# EAGLE board SparkFun_Simultaneous_RFID_Reader_M7E-Panel (EAGLE 9.6.2), part 1 of 3
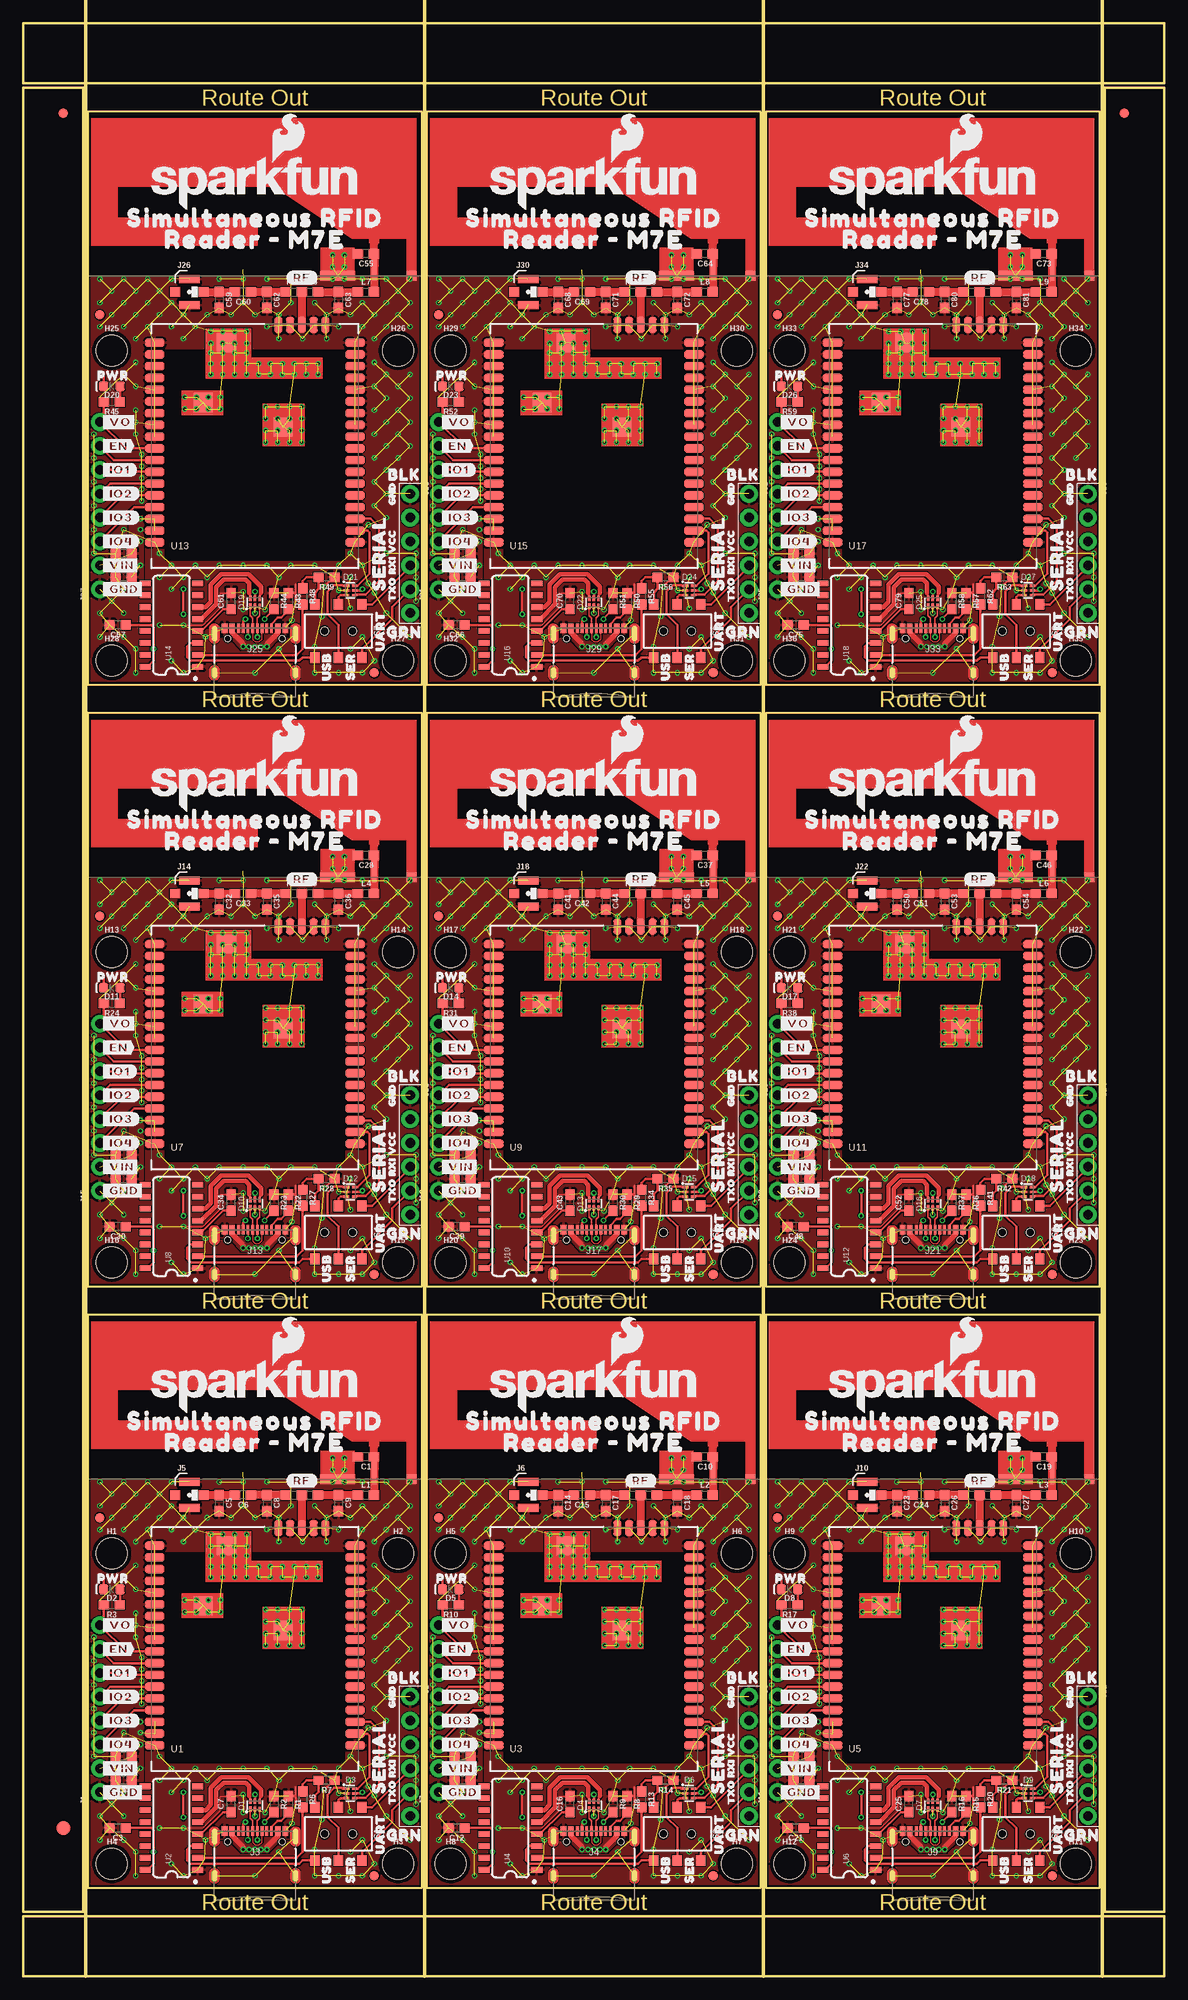
[diagram p0: board, top side]
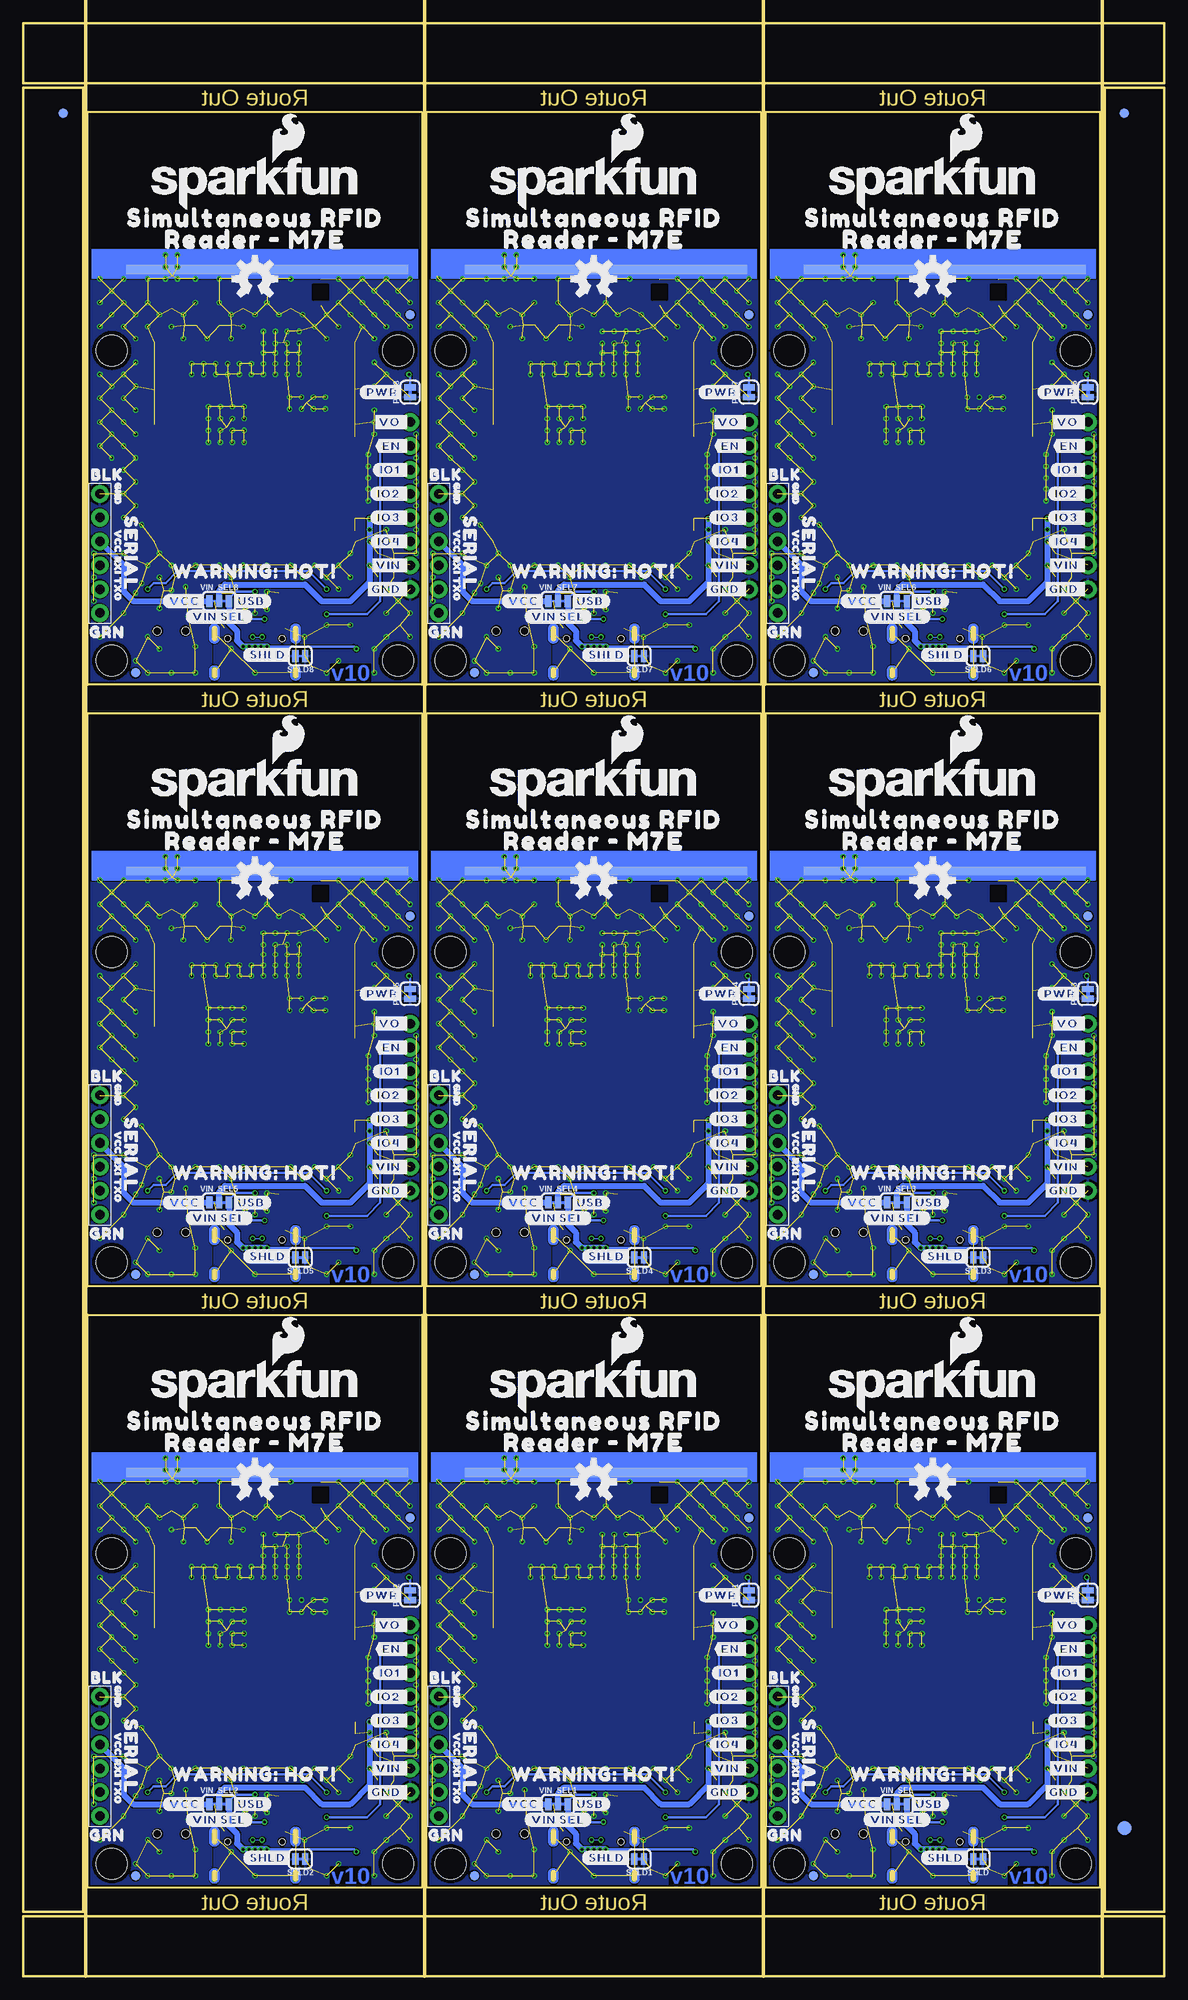
[diagram p1: board, bottom side, seen from below]

Size 121.41 x 207.77 mm. Coordinates in mm from the lower left corner, seen from the top.
Outline: 6.86,9.4 42.42,9.4 42.42,70.36 6.86,70.36 6.86,9.4
Outline: 42.93,9.4 78.49,9.4 78.49,70.36 42.93,70.36 42.93,9.4
Outline: 78.99,9.4 114.55,9.4 114.55,70.36 78.99,70.36 78.99,9.4
Outline: 6.86,73.41 42.42,73.41 42.42,134.37 6.86,134.37 6.86,73.41
Outline: 42.93,73.41 78.49,73.41 78.49,134.37 42.93,134.37 42.93,73.41
Outline: 78.99,73.41 114.55,73.41 114.55,134.37 78.99,134.37 78.99,73.41
Outline: 6.86,137.41 42.42,137.41 42.42,198.37 6.86,198.37 6.86,137.41
Outline: 42.93,137.41 78.49,137.41 78.49,198.37 42.93,198.37 42.93,137.41
Outline: 78.99,137.41 114.55,137.41 114.55,198.37 78.99,198.37 78.99,137.41
Outline: 0,6.35 121.41,6.35 121.41,0 0,0 0,6.35
Outline: 115.06,200.91 121.41,200.91 121.41,6.86 115.06,6.86 115.06,200.91
Outline: 0,207.77 121.41,207.77 121.41,201.42 0,201.42 0,207.77
Outline: 0,200.91 6.35,200.91 6.35,6.86 0,6.86 0,200.91
Copper layers (1*16): Top 0.035mm / dielectric 1.5mm / Bottom 0.035mm
Design rules "SparkFun_Simultaneous_RFID_Reader_M7E": minimum track width 5mil, minimum drill 0.3mm, track to track 5mil, track to pad 5mil, pad to pad 5mil, via to via 5mil, smd to smd 5mil, copper to edge 7mil, drill to drill 7mil, minimum pad ring 5mil, minimum via ring 5mil, stop-mask expansion 2.5mil, vias tented up to drill 25mil, thermal gap 10mil
Net classes: 1 USB: width 0.185 mm, clearance 0.127 mm
tRestrict: area 23.1,50.7 to 23.6,51.7; area 28.6,50.7 to 29.1,51.7; area 30.2,50.7 to 30.7,51.7; area 36.2,50.7 to 36.7,51.7; area 59.2,50.7 to 59.7,51.7; area 64.6,50.7 to 65.2,51.7; area 66.3,50.7 to 66.8,51.7; area 72.3,50.7 to 72.8,51.7; area 95.2,50.7 to 95.8,51.7; area 100.7,50.7 to 101.2,51.7; area 102.4,50.7 to 102.9,51.7; area 108.3,50.7 to 108.8,51.7; area 23.1,114.7 to 23.6,115.7; area 28.6,114.7 to 29.1,115.7; area 30.2,114.7 to 30.7,115.7; area 36.2,114.7 to 36.7,115.7; area 59.2,114.7 to 59.7,115.7; area 64.6,114.7 to 65.2,115.7; area 66.3,114.7 to 66.8,115.7; area 72.3,114.7 to 72.8,115.7; area 95.2,114.7 to 95.8,115.7; area 100.7,114.7 to 101.2,115.7; area 102.4,114.7 to 102.9,115.7; area 108.3,114.7 to 108.8,115.7; area 23.1,178.7 to 23.6,179.7; area 28.6,178.7 to 29.1,179.7; area 30.2,178.7 to 30.7,179.7; area 36.2,178.7 to 36.7,179.7; area 59.2,178.7 to 59.7,179.7; area 64.6,178.7 to 65.2,179.7; area 66.3,178.7 to 66.8,179.7; area 72.3,178.7 to 72.8,179.7; area 95.2,178.7 to 95.8,179.7; area 100.7,178.7 to 101.2,179.7; area 102.4,178.7 to 102.9,179.7; area 108.3,178.7 to 108.8,179.7
Milling: 4 lines

## Footprints (pad centres in the part's own frame; a part is rotated, then mirrored left to right if it is on the bottom)
0603 = smd 1.1 x 1: 1 -0.85,0; 2 0.85,0
SOT886 = smd 0.61 x 0.25: 1 -0.405,0.5 | smd 0.56 x 0.25: 2 -0.43,0; 3 -0.43,-0.5; 4 0.43,-0.5; 5 0.43,0; 6 0.43,0.5
LED-0603 = smd 1 x 1: A -0.877,0; C 0.877,0
TRACE_ANTENNA_915MHZ_THINGMAGIC = smd 0.44 x 3: ANT -0.006,-1.315 | smd 1.02 x 1: GND@1 -3.966,-0.315 | smd 3.677 x 1: GND@2 3.909,-0.315 | smd 30 x 1 bottom: GND@3 14,-1
FIDUCIAL-1X2 = smd 1 x 1: 1 0,0
FIDUCIAL-1.5X3 = smd 1.5 x 1.5: 1 0,0
STAND-OFF = hole 3.302: 0,0
1X08_NO_SILK = drill 1.016 pad 1.88: 1 0,0; 2 2.54,0; 3 5.08,0; 4 7.62,0; 5 10.16,0; 6 12.7,0; 7 15.24,0; 8 17.78,0
1X06_NO_SILK = drill 1.016 pad 1.88: 1 0,0; 2 2.54,0; 3 5.08,0; 4 7.62,0; 5 10.16,0; 6 12.7,0
USB-C-16P-2LAYER-PADS = smd 0.3 x 1: A5 -1.25,-0.34; A6 -0.25,-0.34; A7 0.25,-0.34; A8 1.25,-0.34; B5 1.75,-0.34; B6 0.75,-0.34; B7 -0.75,-0.34; B8 -1.75,-0.34 | smd 0.6 x 1: GND -3.225,-0.34; GND2 3.225,-0.34; VBUS1 -2.45,-0.34; VBUS2 2.45,-0.34 | drill 0.4 pad 0.6 long: SHLD1 -4.318,-0.915; SHLD2 4.318,-0.915; SHLD3 -4.318,-5.095; SHLD4 4.318,-5.095 | hole 0.65: -2.89,-1.445; 2.89,-1.445
U.FL = smd 2.2 x 0.85: 1 0,1.375; 2 0,-1.375 | smd 1.05 x 1: FEED 1.525,0; NC -1.525,0
SMT-JUMPER_2_NC_TRACE_SILK = smd 0.66 x 1.27: 1 -0.521,0; 2 0.521,0
SWITCH_DPDT_SMD_AYZ0202 = smd 1 x 1.15: 1 -2.5,2.825; 2 0,2.825; 3 2.5,2.825; 4 -2.5,-2.825; 5 0,-2.825; 6 2.5,-2.825 | hole 0.85: 1.5,0; -1.5,0
M7E_HECTO_MODULE = smd 2.075 x 0.85: 1 -10.662,11; 2 -10.662,9.75; 3 -10.662,8.5; 4 -10.662,7.25; 5 -10.662,6; 6 -10.662,4.75; 7 -10.662,3.5; 8 -10.662,2.25; 9 -10.662,1; 10 -10.662,-0.25; 11 -10.662,-1.5; 12 -10.662,-2.75; 13 -10.662,-4; 14 -10.662,-5.25; 15 -10.662,-6.5; 16 -10.662,-7.75; 17 -10.662,-9; 18 -10.662,-10.25; 19 10.662,-10.25; 20 10.662,-9; 21 10.662,-7.75; 22 10.662,-6.5; 23 10.662,-5.25; 24 10.662,-4; 25 10.662,-2.75; 26 10.662,-1.5; 27 10.662,-0.25; 28 10.662,1; 29 10.662,2.25; 30 10.662,3.5; 31 10.662,4.75; 32 10.662,6; 33 10.662,7.25; 34 10.662,8.5; 35 10.662,9.75; 36 10.662,11 | smd 0.85 x 1.665: 37 7.5,12.867; 38 6.25,12.867; 39 5,12.867; 40 3.75,12.867; 41 2.5,12.867 | smd 2 x 2: GND_PAD1 3,2; GND_PAD2 -3,11; GND_PAD3 -5.5,4.625
SO016 = smd 0.6 x 1.2: 1 -4.445,-2.8; 2 -3.175,-2.8; 3 -1.905,-2.8; 4 -0.635,-2.8; 5 0.635,-2.8; 6 1.905,-2.8; 7 3.175,-2.8; 8 4.445,-2.8; 9 4.445,2.8; 10 3.175,2.8; 11 1.905,2.8; 12 0.635,2.8; 13 -0.635,2.8; 14 -1.905,2.8; 15 -3.175,2.8; 16 -4.445,2.8
SMT-JUMPER_3_2-NC_TRACE_SILK = smd 0.66 x 1.27: 1 -1.041,0; 2 0,0; 3 1.041,0

## Placement (x,y rotation side)
C1  DNP  [0603]  36.45,55.25 180 top
C2  10nF  [0603]  10.67,23.37 180 top
C3  0.1uF  [0603]  10.03,15.75 180 top
C4  0.1uF  [0603]  10.67,20.83 180 top
C5  DNP  [0603]  20.83,50.33 270 top
C6  1nF  [0603]  23.37,51.18 180 top
C7  10nF  [0603]  22.1,18.29 90 top
C8  DNP  [0603]  25.91,50.33 270 top
C9  DNP  [0603]  33.53,50.33 270 top
C10  DNP  [0603]  72.52,55.25 180 top
C11  10nF  [0603]  46.74,23.37 180 top
C12  0.1uF  [0603]  46.1,15.75 180 top
C13  0.1uF  [0603]  46.74,20.83 180 top
C14  DNP  [0603]  56.9,50.33 270 top
C15  1nF  [0603]  59.44,51.18 180 top
C16  10nF  [0603]  58.17,18.29 90 top
C17  DNP  [0603]  61.98,50.33 270 top
C18  DNP  [0603]  69.6,50.33 270 top
C19  DNP  [0603]  108.59,55.25 180 top
C20  10nF  [0603]  82.8,23.37 180 top
C21  0.1uF  [0603]  82.17,15.75 180 top
C22  0.1uF  [0603]  82.8,20.83 180 top
C23  DNP  [0603]  92.96,50.33 270 top
C24  1nF  [0603]  95.5,51.18 180 top
C25  10nF  [0603]  94.23,18.29 90 top
C26  DNP  [0603]  98.04,50.33 270 top
C27  DNP  [0603]  105.66,50.33 270 top
C28  DNP  [0603]  36.45,119.25 180 top
C29  10nF  [0603]  10.67,87.38 180 top
C30  0.1uF  [0603]  10.03,79.76 180 top
C31  0.1uF  [0603]  10.67,84.84 180 top
C32  DNP  [0603]  20.83,114.34 270 top
C33  1nF  [0603]  23.37,115.19 180 top
C34  10nF  [0603]  22.1,82.3 90 top
C35  DNP  [0603]  25.91,114.34 270 top
C36  DNP  [0603]  33.53,114.34 270 top
C37  DNP  [0603]  72.52,119.25 180 top
C38  10nF  [0603]  46.74,87.38 180 top
C39  0.1uF  [0603]  46.1,79.76 180 top
C40  0.1uF  [0603]  46.74,84.84 180 top
C41  DNP  [0603]  56.9,114.34 270 top
C42  1nF  [0603]  59.44,115.19 180 top
C43  10nF  [0603]  58.17,82.3 90 top
C44  DNP  [0603]  61.98,114.34 270 top
C45  DNP  [0603]  69.6,114.34 270 top
C46  DNP  [0603]  108.59,119.25 180 top
C47  10nF  [0603]  82.8,87.38 180 top
C48  0.1uF  [0603]  82.17,79.76 180 top
C49  0.1uF  [0603]  82.8,84.84 180 top
C50  DNP  [0603]  92.96,114.34 270 top
C51  1nF  [0603]  95.5,115.19 180 top
C52  10nF  [0603]  94.23,82.3 90 top
C53  DNP  [0603]  98.04,114.34 270 top
C54  DNP  [0603]  105.66,114.34 270 top
C55  DNP  [0603]  36.45,183.26 180 top
C56  10nF  [0603]  10.67,151.38 180 top
C57  0.1uF  [0603]  10.03,143.76 180 top
C58  0.1uF  [0603]  10.67,148.84 180 top
C59  DNP  [0603]  20.83,178.35 270 top
C60  1nF  [0603]  23.37,179.2 180 top
C61  10nF  [0603]  22.1,146.3 90 top
C62  DNP  [0603]  25.91,178.35 270 top
C63  DNP  [0603]  33.53,178.35 270 top
C64  DNP  [0603]  72.52,183.26 180 top
C65  10nF  [0603]  46.74,151.38 180 top
C66  0.1uF  [0603]  46.1,143.76 180 top
C67  0.1uF  [0603]  46.74,148.84 180 top
C68  DNP  [0603]  56.9,178.35 270 top
C69  1nF  [0603]  59.44,179.2 180 top
C70  10nF  [0603]  58.17,146.3 90 top
C71  DNP  [0603]  61.98,178.35 270 top
C72  DNP  [0603]  69.6,178.35 270 top
C73  DNP  [0603]  108.59,183.26 180 top
C74  10nF  [0603]  82.8,151.38 180 top
C75  0.1uF  [0603]  82.17,143.76 180 top
C76  0.1uF  [0603]  82.8,148.84 180 top
C77  DNP  [0603]  92.96,178.35 270 top
C78  1nF  [0603]  95.5,179.2 180 top
C79  10nF  [0603]  94.23,146.3 90 top
C80  DNP  [0603]  98.04,178.35 270 top
C81  DNP  [0603]  105.66,178.35 270 top
D1  PRTR5V0U2F  [SOT886]  24.64,18.16 90 top
D2  Red  [LED-0603]  9.4,41.15 180 top
D3  PRTR5V0U2F  [SOT886]  34.8,19.43 0 top
D4  PRTR5V0U2F  [SOT886]  60.71,18.16 90 top
D5  Red  [LED-0603]  45.47,41.15 180 top
D6  PRTR5V0U2F  [SOT886]  70.87,19.43 0 top
D7  PRTR5V0U2F  [SOT886]  96.77,18.16 90 top
D8  Red  [LED-0603]  81.53,41.15 180 top
D9  PRTR5V0U2F  [SOT886]  106.93,19.43 0 top
D10  PRTR5V0U2F  [SOT886]  24.64,82.17 90 top
D11  Red  [LED-0603]  9.4,105.16 180 top
D12  PRTR5V0U2F  [SOT886]  34.8,83.44 0 top
D13  PRTR5V0U2F  [SOT886]  60.71,82.17 90 top
D14  Red  [LED-0603]  45.47,105.16 180 top
D15  PRTR5V0U2F  [SOT886]  70.87,83.44 0 top
D16  PRTR5V0U2F  [SOT886]  96.77,82.17 90 top
D17  Red  [LED-0603]  81.53,105.16 180 top
D18  PRTR5V0U2F  [SOT886]  106.93,83.44 0 top
D19  PRTR5V0U2F  [SOT886]  24.64,146.18 90 top
D20  Red  [LED-0603]  9.4,169.16 180 top
D21  PRTR5V0U2F  [SOT886]  34.8,147.45 0 top
D22  PRTR5V0U2F  [SOT886]  60.71,146.18 90 top
D23  Red  [LED-0603]  45.47,169.16 180 top
D24  PRTR5V0U2F  [SOT886]  70.87,147.45 0 top
D25  PRTR5V0U2F  [SOT886]  96.77,146.18 90 top
D26  Red  [LED-0603]  81.53,169.16 180 top
D27  PRTR5V0U2F  [SOT886]  106.93,147.45 0 top
E1  ANTENNA-GROUNDEDTRACE-915MHZ  [TRACE_ANTENNA_915MHZ_THINGMAGIC]  37.34,52.58 180 top
E2  ANTENNA-GROUNDEDTRACE-915MHZ  [TRACE_ANTENNA_915MHZ_THINGMAGIC]  73.41,52.58 180 top
E3  ANTENNA-GROUNDEDTRACE-915MHZ  [TRACE_ANTENNA_915MHZ_THINGMAGIC]  109.47,52.58 180 top
E4  ANTENNA-GROUNDEDTRACE-915MHZ  [TRACE_ANTENNA_915MHZ_THINGMAGIC]  37.34,116.59 180 top
E5  ANTENNA-GROUNDEDTRACE-915MHZ  [TRACE_ANTENNA_915MHZ_THINGMAGIC]  73.41,116.59 180 top
E6  ANTENNA-GROUNDEDTRACE-915MHZ  [TRACE_ANTENNA_915MHZ_THINGMAGIC]  109.47,116.59 180 top
E7  ANTENNA-GROUNDEDTRACE-915MHZ  [TRACE_ANTENNA_915MHZ_THINGMAGIC]  37.34,180.59 180 top
E8  ANTENNA-GROUNDEDTRACE-915MHZ  [TRACE_ANTENNA_915MHZ_THINGMAGIC]  73.41,180.59 180 top
E9  ANTENNA-GROUNDEDTRACE-915MHZ  [TRACE_ANTENNA_915MHZ_THINGMAGIC]  109.47,180.59 180 top
E$1  [FIDUCIAL-1X2]  4.23,198.25 0 top
E$2  [FIDUCIAL-1X2]  4.23,198.25 0 bottom
E$3  [FIDUCIAL-1X2]  117.18,198.25 0 top
E$4  [FIDUCIAL-1X2]  117.18,198.25 0 bottom
E$5  [FIDUCIAL-1.5X3]  4.23,15.75 0 top
E$6  [FIDUCIAL-1.5X3]  4.23,15.75 0 bottom
FD1  FIDUCIAL1X2  [FIDUCIAL-1X2]  37.34,10.67 0 top
FD2  FIDUCIAL1X2  [FIDUCIAL-1X2]  37.34,10.67 0 bottom
FD3  FIDUCIAL1X2  [FIDUCIAL-1X2]  8.13,48.77 0 top
FD4  FIDUCIAL1X2  [FIDUCIAL-1X2]  8.13,48.77 0 bottom
FD5  FIDUCIAL1X2  [FIDUCIAL-1X2]  73.41,10.67 0 top
FD6  FIDUCIAL1X2  [FIDUCIAL-1X2]  73.41,10.67 0 bottom
FD7  FIDUCIAL1X2  [FIDUCIAL-1X2]  44.2,48.77 0 top
FD8  FIDUCIAL1X2  [FIDUCIAL-1X2]  44.2,48.77 0 bottom
FD9  FIDUCIAL1X2  [FIDUCIAL-1X2]  109.47,10.67 0 top
FD10  FIDUCIAL1X2  [FIDUCIAL-1X2]  109.47,10.67 0 bottom
FD11  FIDUCIAL1X2  [FIDUCIAL-1X2]  80.26,48.77 0 top
FD12  FIDUCIAL1X2  [FIDUCIAL-1X2]  80.26,48.77 0 bottom
FD13  FIDUCIAL1X2  [FIDUCIAL-1X2]  37.34,74.68 0 top
FD14  FIDUCIAL1X2  [FIDUCIAL-1X2]  37.34,74.68 0 bottom
FD15  FIDUCIAL1X2  [FIDUCIAL-1X2]  8.13,112.78 0 top
FD16  FIDUCIAL1X2  [FIDUCIAL-1X2]  8.13,112.78 0 bottom
FD17  FIDUCIAL1X2  [FIDUCIAL-1X2]  73.41,74.68 0 top
FD18  FIDUCIAL1X2  [FIDUCIAL-1X2]  73.41,74.68 0 bottom
FD19  FIDUCIAL1X2  [FIDUCIAL-1X2]  44.2,112.78 0 top
FD20  FIDUCIAL1X2  [FIDUCIAL-1X2]  44.2,112.78 0 bottom
FD21  FIDUCIAL1X2  [FIDUCIAL-1X2]  109.47,74.68 0 top
FD22  FIDUCIAL1X2  [FIDUCIAL-1X2]  109.47,74.68 0 bottom
FD23  FIDUCIAL1X2  [FIDUCIAL-1X2]  80.26,112.78 0 top
FD24  FIDUCIAL1X2  [FIDUCIAL-1X2]  80.26,112.78 0 bottom
FD25  FIDUCIAL1X2  [FIDUCIAL-1X2]  37.34,138.68 0 top
FD26  FIDUCIAL1X2  [FIDUCIAL-1X2]  37.34,138.68 0 bottom
FD27  FIDUCIAL1X2  [FIDUCIAL-1X2]  8.13,176.78 0 top
FD28  FIDUCIAL1X2  [FIDUCIAL-1X2]  8.13,176.78 0 bottom
FD29  FIDUCIAL1X2  [FIDUCIAL-1X2]  73.41,138.68 0 top
FD30  FIDUCIAL1X2  [FIDUCIAL-1X2]  73.41,138.68 0 bottom
FD31  FIDUCIAL1X2  [FIDUCIAL-1X2]  44.2,176.78 0 top
FD32  FIDUCIAL1X2  [FIDUCIAL-1X2]  44.2,176.78 0 bottom
FD33  FIDUCIAL1X2  [FIDUCIAL-1X2]  109.47,138.68 0 top
FD34  FIDUCIAL1X2  [FIDUCIAL-1X2]  109.47,138.68 0 bottom
FD35  FIDUCIAL1X2  [FIDUCIAL-1X2]  80.26,176.78 0 top
FD36  FIDUCIAL1X2  [FIDUCIAL-1X2]  80.26,176.78 0 bottom
H1  STAND-OFF  [STAND-OFF]  9.4,44.96 0 top
H2  STAND-OFF  [STAND-OFF]  39.88,44.96 0 top
H3  STAND-OFF  [STAND-OFF]  39.88,11.94 0 top
H4  STAND-OFF  [STAND-OFF]  9.4,11.94 0 top
H5  STAND-OFF  [STAND-OFF]  45.47,44.96 0 top
H6  STAND-OFF  [STAND-OFF]  75.95,44.96 0 top
H7  STAND-OFF  [STAND-OFF]  75.95,11.94 0 top
H8  STAND-OFF  [STAND-OFF]  45.47,11.94 0 top
H9  STAND-OFF  [STAND-OFF]  81.53,44.96 0 top
H10  STAND-OFF  [STAND-OFF]  112.01,44.96 0 top
H11  STAND-OFF  [STAND-OFF]  112.01,11.94 0 top
H12  STAND-OFF  [STAND-OFF]  81.53,11.94 0 top
H13  STAND-OFF  [STAND-OFF]  9.4,108.97 0 top
H14  STAND-OFF  [STAND-OFF]  39.88,108.97 0 top
H15  STAND-OFF  [STAND-OFF]  39.88,75.95 0 top
H16  STAND-OFF  [STAND-OFF]  9.4,75.95 0 top
H17  STAND-OFF  [STAND-OFF]  45.47,108.97 0 top
H18  STAND-OFF  [STAND-OFF]  75.95,108.97 0 top
H19  STAND-OFF  [STAND-OFF]  75.95,75.95 0 top
H20  STAND-OFF  [STAND-OFF]  45.47,75.95 0 top
H21  STAND-OFF  [STAND-OFF]  81.53,108.97 0 top
H22  STAND-OFF  [STAND-OFF]  112.01,108.97 0 top
H23  STAND-OFF  [STAND-OFF]  112.01,75.95 0 top
H24  STAND-OFF  [STAND-OFF]  81.53,75.95 0 top
H25  STAND-OFF  [STAND-OFF]  9.4,172.97 0 top
H26  STAND-OFF  [STAND-OFF]  39.88,172.97 0 top
H27  STAND-OFF  [STAND-OFF]  39.88,139.95 0 top
H28  STAND-OFF  [STAND-OFF]  9.4,139.95 0 top
H29  STAND-OFF  [STAND-OFF]  45.47,172.97 0 top
H30  STAND-OFF  [STAND-OFF]  75.95,172.97 0 top
H31  STAND-OFF  [STAND-OFF]  75.95,139.95 0 top
H32  STAND-OFF  [STAND-OFF]  45.47,139.95 0 top
H33  STAND-OFF  [STAND-OFF]  81.53,172.97 0 top
H34  STAND-OFF  [STAND-OFF]  112.01,172.97 0 top
H35  STAND-OFF  [STAND-OFF]  112.01,139.95 0 top
H36  STAND-OFF  [STAND-OFF]  81.53,139.95 0 top
J1  [1X08_NO_SILK]  8.13,19.56 90 top
J2  [1X06_NO_SILK]  41.15,29.72 270 top
J3  [USB-C-16P-2LAYER-PADS]  24.64,15.75 0 top
J4  [USB-C-16P-2LAYER-PADS]  60.71,15.75 0 top
J5  U.FL  [U.FL]  17.65,51.18 0 top
J6  U.FL  [U.FL]  53.72,51.18 0 top
J7  [1X08_NO_SILK]  44.2,19.56 90 top
J8  [1X06_NO_SILK]  77.22,29.72 270 top
J9  [USB-C-16P-2LAYER-PADS]  96.77,15.75 0 top
J10  U.FL  [U.FL]  89.79,51.18 0 top
J11  [1X08_NO_SILK]  80.26,19.56 90 top
J12  [1X06_NO_SILK]  113.28,29.72 270 top
J13  [USB-C-16P-2LAYER-PADS]  24.64,79.76 0 top
J14  U.FL  [U.FL]  17.65,115.19 0 top
J15  [1X08_NO_SILK]  8.13,83.57 90 top
J16  [1X06_NO_SILK]  41.15,93.73 270 top
J17  [USB-C-16P-2LAYER-PADS]  60.71,79.76 0 top
J18  U.FL  [U.FL]  53.72,115.19 0 top
J19  [1X08_NO_SILK]  44.2,83.57 90 top
J20  [1X06_NO_SILK]  77.22,93.73 270 top
J21  [USB-C-16P-2LAYER-PADS]  96.77,79.76 0 top
J22  U.FL  [U.FL]  89.79,115.19 0 top
J23  [1X08_NO_SILK]  80.26,83.57 90 top
J24  [1X06_NO_SILK]  113.28,93.73 270 top
J25  [USB-C-16P-2LAYER-PADS]  24.64,143.76 0 top
J26  U.FL  [U.FL]  17.65,179.2 0 top
J27  [1X08_NO_SILK]  8.13,147.57 90 top
J28  [1X06_NO_SILK]  41.15,157.73 270 top
J29  [USB-C-16P-2LAYER-PADS]  60.71,143.76 0 top
J30  U.FL  [U.FL]  53.72,179.2 0 top
J31  [1X08_NO_SILK]  44.2,147.57 90 top
J32  [1X06_NO_SILK]  77.22,157.73 270 top
J33  [USB-C-16P-2LAYER-PADS]  96.77,143.76 0 top
J34  U.FL  [U.FL]  89.79,179.2 0 top
J35  [1X08_NO_SILK]  80.26,147.57 90 top
J36  [1X06_NO_SILK]  113.28,157.73 270 top
L1  3.9NH  [0603]  36.45,51.18 0 top
L2  3.9NH  [0603]  72.52,51.18 0 top
L3  3.9NH  [0603]  108.59,51.18 0 top
L4  3.9NH  [0603]  36.45,115.19 0 top
L5  3.9NH  [0603]  72.52,115.19 0 top
L6  3.9NH  [0603]  108.59,115.19 0 top
L7  3.9NH  [0603]  36.45,179.2 0 top
L8  3.9NH  [0603]  72.52,179.2 0 top
L9  3.9NH  [0603]  108.59,179.2 0 top
LOGO1  OSHW-LOGOM  [OSHW-LOGO-M]  24.64,52.58 0 bottom
LOGO2  SFE_LOGO_NAME_FLAME.2_INCH  [SFE_LOGO_NAME_FLAME_.2]  24.64,62.74 0 top
LOGO3  SFE_LOGO_NAME_FLAME.2_INCH  [SFE_LOGO_NAME_FLAME_.2]  24.64,62.74 0 bottom
LOGO4  OSHW-LOGOM  [OSHW-LOGO-M]  60.71,52.58 0 bottom
LOGO5  SFE_LOGO_NAME_FLAME.2_INCH  [SFE_LOGO_NAME_FLAME_.2]  60.71,62.74 0 top
LOGO6  SFE_LOGO_NAME_FLAME.2_INCH  [SFE_LOGO_NAME_FLAME_.2]  60.71,62.74 0 bottom
LOGO7  OSHW-LOGOM  [OSHW-LOGO-M]  96.77,52.58 0 bottom
LOGO8  SFE_LOGO_NAME_FLAME.2_INCH  [SFE_LOGO_NAME_FLAME_.2]  96.77,62.74 0 top
LOGO9  SFE_LOGO_NAME_FLAME.2_INCH  [SFE_LOGO_NAME_FLAME_.2]  96.77,62.74 0 bottom
LOGO10  OSHW-LOGOM  [OSHW-LOGO-M]  24.64,116.59 0 bottom
LOGO11  SFE_LOGO_NAME_FLAME.2_INCH  [SFE_LOGO_NAME_FLAME_.2]  24.64,126.75 0 top
LOGO12  SFE_LOGO_NAME_FLAME.2_INCH  [SFE_LOGO_NAME_FLAME_.2]  24.64,126.75 0 bottom
LOGO13  OSHW-LOGOM  [OSHW-LOGO-M]  60.71,116.59 0 bottom
LOGO14  SFE_LOGO_NAME_FLAME.2_INCH  [SFE_LOGO_NAME_FLAME_.2]  60.71,126.75 0 top
LOGO15  SFE_LOGO_NAME_FLAME.2_INCH  [SFE_LOGO_NAME_FLAME_.2]  60.71,126.75 0 bottom
LOGO16  OSHW-LOGOM  [OSHW-LOGO-M]  96.77,116.59 0 bottom
LOGO17  SFE_LOGO_NAME_FLAME.2_INCH  [SFE_LOGO_NAME_FLAME_.2]  96.77,126.75 0 top
LOGO18  SFE_LOGO_NAME_FLAME.2_INCH  [SFE_LOGO_NAME_FLAME_.2]  96.77,126.75 0 bottom
LOGO19  OSHW-LOGOM  [OSHW-LOGO-M]  24.64,180.59 0 bottom
LOGO20  SFE_LOGO_NAME_FLAME.2_INCH  [SFE_LOGO_NAME_FLAME_.2]  24.64,190.75 0 top
LOGO21  SFE_LOGO_NAME_FLAME.2_INCH  [SFE_LOGO_NAME_FLAME_.2]  24.64,190.75 0 bottom
LOGO22  OSHW-LOGOM  [OSHW-LOGO-M]  60.71,180.59 0 bottom
LOGO23  SFE_LOGO_NAME_FLAME.2_INCH  [SFE_LOGO_NAME_FLAME_.2]  60.71,190.75 0 top
LOGO24  SFE_LOGO_NAME_FLAME.2_INCH  [SFE_LOGO_NAME_FLAME_.2]  60.71,190.75 0 bottom
LOGO25  OSHW-LOGOM  [OSHW-LOGO-M]  96.77,180.59 0 bottom
LOGO26  SFE_LOGO_NAME_FLAME.2_INCH  [SFE_LOGO_NAME_FLAME_.2]  96.77,190.75 0 top
LOGO27  SFE_LOGO_NAME_FLAME.2_INCH  [SFE_LOGO_NAME_FLAME_.2]  96.77,190.75 0 bottom
PWR  JUMPER-SMT_2_NC_TRACE_SILK  [SMT-JUMPER_2_NC_TRACE_SILK]  8.13,40.51 90 bottom
PWR1  JUMPER-SMT_2_NC_TRACE_SILK  [SMT-JUMPER_2_NC_TRACE_SILK]  44.2,40.51 90 bottom
PWR2  JUMPER-SMT_2_NC_TRACE_SILK  [SMT-JUMPER_2_NC_TRACE_SILK]  80.26,40.51 90 bottom
PWR3  JUMPER-SMT_2_NC_TRACE_SILK  [SMT-JUMPER_2_NC_TRACE_SILK]  8.13,104.52 90 bottom
PWR4  JUMPER-SMT_2_NC_TRACE_SILK  [SMT-JUMPER_2_NC_TRACE_SILK]  44.2,104.52 90 bottom
PWR5  JUMPER-SMT_2_NC_TRACE_SILK  [SMT-JUMPER_2_NC_TRACE_SILK]  80.26,104.52 90 bottom
PWR6  JUMPER-SMT_2_NC_TRACE_SILK  [SMT-JUMPER_2_NC_TRACE_SILK]  8.13,168.53 90 bottom
PWR7  JUMPER-SMT_2_NC_TRACE_SILK  [SMT-JUMPER_2_NC_TRACE_SILK]  44.2,168.53 90 bottom
PWR8  JUMPER-SMT_2_NC_TRACE_SILK  [SMT-JUMPER_2_NC_TRACE_SILK]  80.26,168.53 90 bottom
R1  5.1k  [0603]  28.19,18.29 270 top
R2  5.1k  [0603]  26.67,18.29 270 top
R3  4.7k  [0603]  9.4,39.5 180 top
R4  0  [0603]  30.48,51.18 0 top
R5  DNP  [0603]  28.78,51.18 0 top
R6  5.1k  [0603]  29.72,18.8 270 top
R7  10k  [0603]  32.26,20.83 180 top
R8  5.1k  [0603]  64.26,18.29 270 top
R9  5.1k  [0603]  62.74,18.29 270 top
R10  4.7k  [0603]  45.47,39.5 180 top
R11  0  [0603]  66.55,51.18 0 top
R12  DNP  [0603]  64.85,51.18 0 top
R13  5.1k  [0603]  65.79,18.8 270 top
R14  10k  [0603]  68.33,20.83 180 top
R15  5.1k  [0603]  100.33,18.29 270 top
R16  5.1k  [0603]  98.81,18.29 270 top
R17  4.7k  [0603]  81.53,39.5 180 top
R18  0  [0603]  102.62,51.18 0 top
R19  DNP  [0603]  100.91,51.18 0 top
R20  5.1k  [0603]  101.85,18.8 270 top
R21  10k  [0603]  104.39,20.83 180 top
R22  5.1k  [0603]  28.19,82.3 270 top
R23  5.1k  [0603]  26.67,82.3 270 top
R24  4.7k  [0603]  9.4,103.5 180 top
R25  0  [0603]  30.48,115.19 0 top
R26  DNP  [0603]  28.78,115.19 0 top
R27  5.1k  [0603]  29.72,82.8 270 top
R28  10k  [0603]  32.26,84.84 180 top
R29  5.1k  [0603]  64.26,82.3 270 top
R30  5.1k  [0603]  62.74,82.3 270 top
R31  4.7k  [0603]  45.47,103.5 180 top
R32  0  [0603]  66.55,115.19 0 top
R33  DNP  [0603]  64.85,115.19 0 top
R34  5.1k  [0603]  65.79,82.8 270 top
R35  10k  [0603]  68.33,84.84 180 top
R36  5.1k  [0603]  100.33,82.3 270 top
R37  5.1k  [0603]  98.81,82.3 270 top
R38  4.7k  [0603]  81.53,103.5 180 top
R39  0  [0603]  102.62,115.19 0 top
R40  DNP  [0603]  100.91,115.19 0 top
R41  5.1k  [0603]  101.85,82.8 270 top
R42  10k  [0603]  104.39,84.84 180 top
R43  5.1k  [0603]  28.19,146.3 270 top
R44  5.1k  [0603]  26.67,146.3 270 top
R45  4.7k  [0603]  9.4,167.51 180 top
R46  0  [0603]  30.48,179.2 0 top
R47  DNP  [0603]  28.78,179.2 0 top
R48  5.1k  [0603]  29.72,146.81 270 top
R49  10k  [0603]  32.26,148.84 180 top
R50  5.1k  [0603]  64.26,146.3 270 top
R51  5.1k  [0603]  62.74,146.3 270 top
R52  4.7k  [0603]  45.47,167.51 180 top
R53  0  [0603]  66.55,179.2 0 top
R54  DNP  [0603]  64.85,179.2 0 top
R55  5.1k  [0603]  65.79,146.81 270 top
R56  10k  [0603]  68.33,148.84 180 top
R57  5.1k  [0603]  100.33,146.3 270 top
R58  5.1k  [0603]  98.81,146.3 270 top
R59  4.7k  [0603]  81.53,167.51 180 top
R60  0  [0603]  102.62,179.2 0 top
R61  DNP  [0603]  100.91,179.2 0 top
R62  5.1k  [0603]  101.85,146.81 270 top
R63  10k  [0603]  104.39,148.84 180 top
S1  [SWITCH_DPDT_SMD_AYZ0202]  33.53,15.11 180 top
S2  [SWITCH_DPDT_SMD_AYZ0202]  69.6,15.11 180 top
S3  [SWITCH_DPDT_SMD_AYZ0202]  105.66,15.11 180 top
S4  [SWITCH_DPDT_SMD_AYZ0202]  33.53,79.12 180 top
S5  [SWITCH_DPDT_SMD_AYZ0202]  69.6,79.12 180 top
S6  [SWITCH_DPDT_SMD_AYZ0202]  105.66,79.12 180 top
S7  [SWITCH_DPDT_SMD_AYZ0202]  33.53,143.13 180 top
S8  [SWITCH_DPDT_SMD_AYZ0202]  69.6,143.13 180 top
S9  [SWITCH_DPDT_SMD_AYZ0202]  105.66,143.13 180 top
SHLD  JUMPER-SMT_2_NC_TRACE_SILK  [SMT-JUMPER_2_NC_TRACE_SILK]  19.81,12.45 180 bottom
SHLD1  JUMPER-SMT_2_NC_TRACE_SILK  [SMT-JUMPER_2_NC_TRACE_SILK]  55.88,12.45 180 bottom
SHLD2  JUMPER-SMT_2_NC_TRACE_SILK  [SMT-JUMPER_2_NC_TRACE_SILK]  91.95,12.45 180 bottom
SHLD3  JUMPER-SMT_2_NC_TRACE_SILK  [SMT-JUMPER_2_NC_TRACE_SILK]  19.81,76.45 180 bottom
SHLD4  JUMPER-SMT_2_NC_TRACE_SILK  [SMT-JUMPER_2_NC_TRACE_SILK]  55.88,76.45 180 bottom
SHLD5  JUMPER-SMT_2_NC_TRACE_SILK  [SMT-JUMPER_2_NC_TRACE_SILK]  91.95,76.45 180 bottom
SHLD6  JUMPER-SMT_2_NC_TRACE_SILK  [SMT-JUMPER_2_NC_TRACE_SILK]  19.81,140.46 180 bottom
SHLD7  JUMPER-SMT_2_NC_TRACE_SILK  [SMT-JUMPER_2_NC_TRACE_SILK]  55.88,140.46 180 bottom
SHLD8  JUMPER-SMT_2_NC_TRACE_SILK  [SMT-JUMPER_2_NC_TRACE_SILK]  91.95,140.46 180 bottom
U1  UHF_RFID_NANO_MODULE_M7E_HECTO  [M7E_HECTO_MODULE]  24.64,34.8 0 top
U2  CH340C  [SO016]  15.75,15.75 90 top
U3  UHF_RFID_NANO_MODULE_M7E_HECTO  [M7E_HECTO_MODULE]  60.71,34.8 0 top
U4  CH340C  [SO016]  51.82,15.75 90 top
U5  UHF_RFID_NANO_MODULE_M7E_HECTO  [M7E_HECTO_MODULE]  96.77,34.8 0 top
U6  CH340C  [SO016]  87.88,15.75 90 top
U7  UHF_RFID_NANO_MODULE_M7E_HECTO  [M7E_HECTO_MODULE]  24.64,98.81 0 top
U8  CH340C  [SO016]  15.75,79.76 90 top
U9  UHF_RFID_NANO_MODULE_M7E_HECTO  [M7E_HECTO_MODULE]  60.71,98.81 0 top
U10  CH340C  [SO016]  51.82,79.76 90 top
U11  UHF_RFID_NANO_MODULE_M7E_HECTO  [M7E_HECTO_MODULE]  96.77,98.81 0 top
U12  CH340C  [SO016]  87.88,79.76 90 top
U13  UHF_RFID_NANO_MODULE_M7E_HECTO  [M7E_HECTO_MODULE]  24.64,162.81 0 top
U14  CH340C  [SO016]  15.75,143.76 90 top
U15  UHF_RFID_NANO_MODULE_M7E_HECTO  [M7E_HECTO_MODULE]  60.71,162.81 0 top
U16  CH340C  [SO016]  51.82,143.76 90 top
U17  UHF_RFID_NANO_MODULE_M7E_HECTO  [M7E_HECTO_MODULE]  96.77,162.81 0 top
U18  CH340C  [SO016]  87.88,143.76 90 top
U$1  [SIMULTANEOUS_RFID0]  24.64,59.05 0 bottom
U$2  [READER_#_M7E0]  24.64,56.77 0 bottom
U$3  [#USB#0]  27.18,18.29 0 bottom
U$4  [#VCC#0]  29.84,18.29 0 bottom
U$5  [SERIAL0]  37.85,23.37 270 bottom
U$6  [#_GND#0]  8.13,19.56 0 top
U$7  [SERIAL0]  37.85,23.37 90 top
U$8  [UART0]  37.97,15.11 90 top
U$9  [#_GND#0]  44.2,19.56 0 top
U$10  [#_VIN#0]  8.13,22.1 0 top
U$11  [#_IO4#0]  8.13,24.64 0 top
U$12  [#_IO3#0]  8.13,27.18 0 top
U$13  [#_IO2#0]  8.13,29.72 0 top
U$14  [#_IO1#0]  8.13,32.26 0 top
U$15  [#_EN#0]  8.13,34.8 0 top
U$16  [SER0]  34.8,11.3 90 top
U$17  [#VIN_SEL#0]  28.45,16.64 0 bottom
U$18  [#VO_#0]  8.13,37.34 0 bottom
U$19  [SIMULTANEOUS_RFID0]  24.64,59.05 0 top
U$20  [READER_#_M7E0]  24.64,56.77 0 top
U$21  [#_VO#0]  8.13,37.34 0 top
U$22  [#_VIN#0]  44.2,22.1 0 top
U$23  [#_IO4#0]  44.2,24.64 0 top
U$24  [#_IO3#0]  44.2,27.18 0 top
U$25  [#_IO2#0]  44.2,29.72 0 top
U$26  [#_IO1#0]  44.2,32.26 0 top
U$27  [#GND_#0]  8.13,19.56 0 bottom
U$28  [#_EN#0]  44.2,34.8 0 top
U$29  [#GND_#0]  44.2,19.56 0 bottom
U$30  [#EN_#0]  44.2,34.8 0 bottom
U$31  [#IO1_#0]  44.2,32.26 0 bottom
U$32  [#IO2_#0]  44.2,29.72 0 bottom
U$33  [#IO3_#0]  44.2,27.18 0 bottom
U$34  [#IO4_#0]  44.2,24.64 0 bottom
U$35  [#VIN_#0]  44.2,22.1 0 bottom
U$36  [USB0]  68.33,11.3 90 top
U$37  [#PWR#0]  44.83,40.51 0 bottom
U$38  [#SHLD#0]  56.77,12.57 0 bottom
U$39  [#EN_#0]  8.13,34.8 0 bottom
U$40  [#IO1_#0]  8.13,32.26 0 bottom
U$41  [#IO2_#0]  8.13,29.72 0 bottom
U$42  [#IO3_#0]  8.13,27.18 0 bottom
U$43  [#IO4_#0]  8.13,24.64 0 bottom
U$44  [#VIN_#0]  8.13,22.1 0 bottom
U$45  [USB0]  32.26,11.3 90 top
U$46  [PWR0]  45.59,42.29 0 top
U$47  [#RF#0]  65.71,52.7 0 top
U$48  [WARNING#_HOT##0]  60.71,21.46 0 bottom
U$49  [#PWR#0]  8.76,40.51 0 bottom
U$50  [#SHLD#0]  20.7,12.57 0 bottom
U$51  [SERIAL0]  73.91,23.37 270 bottom
U$52  [PWR0]  9.52,42.29 0 top
U$53  [SERIAL0]  73.91,23.37 90 top
U$54  [UART0]  74.04,15.11 90 top
U$55  [SER0]  70.87,11.3 90 top
U$56  [#RF#0]  29.64,52.7 0 top
U$57  [WARNING#_HOT##0]  24.64,21.46 0 bottom
U$58  [SIMULTANEOUS_RFID0]  60.71,59.05 0 top
U$59  [READER_#_M7E0]  60.71,56.77 0 top
U$60  [SIMULTANEOUS_RFID0]  60.71,59.05 0 bottom
U$61  [READER_#_M7E0]  60.71,56.77 0 bottom
U$62  [#USB#0]  63.25,18.29 0 bottom
U$63  [#VCC#0]  65.91,18.29 0 bottom
U$64  [#VIN_SEL#0]  64.52,16.64 0 bottom
U$65  [#_VO#0]  44.2,37.34 0 top
U$66  [#VO_#0]  44.2,37.34 0 bottom
U$67  [#_GND#0]  80.26,19.56 0 top
U$68  [#_VIN#0]  80.26,22.1 0 top
U$69  [#_IO4#0]  80.26,24.64 0 top
U$70  [#_IO3#0]  80.26,27.18 0 top
U$71  [#_IO2#0]  80.26,29.72 0 top
U$72  [#_IO1#0]  80.26,32.26 0 top
U$73  [#_EN#0]  80.26,34.8 0 top
U$74  [#GND_#0]  80.26,19.56 0 bottom
U$75  [#EN_#0]  80.26,34.8 0 bottom
U$76  [#IO1_#0]  80.26,32.26 0 bottom
U$77  [#IO2_#0]  80.26,29.72 0 bottom
U$78  [#IO3_#0]  80.26,27.18 0 bottom
U$79  [#IO4_#0]  80.26,24.64 0 bottom
U$80  [#VIN_#0]  80.26,22.1 0 bottom
U$81  [USB0]  104.39,11.3 90 top
U$82  [#PWR#0]  80.9,40.51 0 bottom
U$83  [#SHLD#0]  92.84,12.57 0 bottom
U$84  [PWR0]  81.66,42.29 0 top
U$85  [#RF#0]  101.78,52.7 0 top
U$86  [WARNING#_HOT##0]  96.77,21.46 0 bottom
U$87  [SERIAL0]  109.98,23.37 270 bottom
U$88  [SERIAL0]  109.98,23.37 90 top
U$89  [UART0]  110.11,15.11 90 top
U$90  [SER0]  106.93,11.3 90 top
U$91  [SIMULTANEOUS_RFID0]  96.77,59.05 0 top
U$92  [READER_#_M7E0]  96.77,56.77 0 top
U$93  [SIMULTANEOUS_RFID0]  96.77,59.05 0 bottom
U$94  [READER_#_M7E0]  96.77,56.77 0 bottom
U$95  [#USB#0]  99.31,18.29 0 bottom
U$96  [#VCC#0]  101.98,18.29 0 bottom
U$97  [#VIN_SEL#0]  100.58,16.64 0 bottom
U$98  [#_VO#0]  80.26,37.34 0 top
U$99  [#VO_#0]  80.26,37.34 0 bottom
U$100  [#_GND#0]  8.13,83.57 0 top
U$101  [#_VIN#0]  8.13,86.11 0 top
U$102  [#_IO4#0]  8.13,88.65 0 top
U$103  [#_IO3#0]  8.13,91.19 0 top
U$104  [#_IO2#0]  8.13,93.73 0 top
U$105  [#_IO1#0]  8.13,96.27 0 top
U$106  [#_EN#0]  8.13,98.81 0 top
U$107  [#GND_#0]  8.13,83.57 0 bottom
U$108  [#EN_#0]  8.13,98.81 0 bottom
U$109  [#IO1_#0]  8.13,96.27 0 bottom
U$110  [#IO2_#0]  8.13,93.73 0 bottom
U$111  [#IO3_#0]  8.13,91.19 0 bottom
U$112  [#IO4_#0]  8.13,88.65 0 bottom
U$113  [#VIN_#0]  8.13,86.11 0 bottom
U$114  [USB0]  32.26,75.31 90 top
U$115  [#PWR#0]  8.76,104.52 0 bottom
U$116  [#SHLD#0]  20.7,76.58 0 bottom
U$117  [PWR0]  9.52,106.3 0 top
U$118  [#RF#0]  29.64,116.71 0 top
U$119  [WARNING#_HOT##0]  24.64,85.47 0 bottom
U$120  [SERIAL0]  37.85,87.38 270 bottom
U$121  [SERIAL0]  37.85,87.38 90 top
U$122  [UART0]  37.97,79.12 90 top
U$123  [SER0]  34.8,75.31 90 top
U$124  [SIMULTANEOUS_RFID0]  24.64,123.06 0 top
U$125  [READER_#_M7E0]  24.64,120.78 0 top
U$126  [SIMULTANEOUS_RFID0]  24.64,123.06 0 bottom
U$127  [READER_#_M7E0]  24.64,120.78 0 bottom
U$128  [#USB#0]  27.18,82.3 0 bottom
U$129  [#VCC#0]  29.84,82.3 0 bottom
U$130  [#VIN_SEL#0]  28.45,80.64 0 bottom
U$131  [#_VO#0]  8.13,101.35 0 top
U$132  [#VO_#0]  8.13,101.35 0 bottom
U$133  [#_GND#0]  44.2,83.57 0 top
U$134  [#_VIN#0]  44.2,86.11 0 top
U$135  [#_IO4#0]  44.2,88.65 0 top
U$136  [#_IO3#0]  44.2,91.19 0 top
U$137  [#_IO2#0]  44.2,93.73 0 top
U$138  [#_IO1#0]  44.2,96.27 0 top
U$139  [#_EN#0]  44.2,98.81 0 top
U$140  [#GND_#0]  44.2,83.57 0 bottom
U$141  [#EN_#0]  44.2,98.81 0 bottom
U$142  [#IO1_#0]  44.2,96.27 0 bottom
U$143  [#IO2_#0]  44.2,93.73 0 bottom
U$144  [#IO3_#0]  44.2,91.19 0 bottom
U$145  [#IO4_#0]  44.2,88.65 0 bottom
U$146  [#VIN_#0]  44.2,86.11 0 bottom
U$147  [USB0]  68.33,75.31 90 top
U$148  [#PWR#0]  44.83,104.52 0 bottom
U$149  [#SHLD#0]  56.77,76.58 0 bottom
U$150  [PWR0]  45.59,106.3 0 top
U$151  [#RF#0]  65.71,116.71 0 top
U$152  [WARNING#_HOT##0]  60.71,85.47 0 bottom
U$153  [SERIAL0]  73.91,87.38 270 bottom
U$154  [SERIAL0]  73.91,87.38 90 top
U$155  [UART0]  74.04,79.12 90 top
U$156  [SER0]  70.87,75.31 90 top
U$157  [SIMULTANEOUS_RFID0]  60.71,123.06 0 top
U$158  [READER_#_M7E0]  60.71,120.78 0 top
U$159  [SIMULTANEOUS_RFID0]  60.71,123.06 0 bottom
U$160  [READER_#_M7E0]  60.71,120.78 0 bottom
U$161  [#USB#0]  63.25,82.3 0 bottom
U$162  [#VCC#0]  65.91,82.3 0 bottom
U$163  [#VIN_SEL#0]  64.52,80.64 0 bottom
U$164  [#_VO#0]  44.2,101.35 0 top
U$165  [#VO_#0]  44.2,101.35 0 bottom
U$166  [#_GND#0]  80.26,83.57 0 top
U$167  [#_VIN#0]  80.26,86.11 0 top
U$168  [#_IO4#0]  80.26,88.65 0 top
U$169  [#_IO3#0]  80.26,91.19 0 top
U$170  [#_IO2#0]  80.26,93.73 0 top
U$171  [#_IO1#0]  80.26,96.27 0 top
U$172  [#_EN#0]  80.26,98.81 0 top
U$173  [#GND_#0]  80.26,83.57 0 bottom
U$174  [#EN_#0]  80.26,98.81 0 bottom
U$175  [#IO1_#0]  80.26,96.27 0 bottom
U$176  [#IO2_#0]  80.26,93.73 0 bottom
U$177  [#IO3_#0]  80.26,91.19 0 bottom
U$178  [#IO4_#0]  80.26,88.65 0 bottom
U$179  [#VIN_#0]  80.26,86.11 0 bottom
U$180  [USB0]  104.39,75.31 90 top
U$181  [#PWR#0]  80.9,104.52 0 bottom
U$182  [#SHLD#0]  92.84,76.58 0 bottom
U$183  [PWR0]  81.66,106.3 0 top
U$184  [#RF#0]  101.78,116.71 0 top
U$185  [WARNING#_HOT##0]  96.77,85.47 0 bottom
U$186  [SERIAL0]  109.98,87.38 270 bottom
U$187  [SERIAL0]  109.98,87.38 90 top
U$188  [UART0]  110.11,79.12 90 top
U$189  [SER0]  106.93,75.31 90 top
U$190  [SIMULTANEOUS_RFID0]  96.77,123.06 0 top
U$191  [READER_#_M7E0]  96.77,120.78 0 top
U$192  [SIMULTANEOUS_RFID0]  96.77,123.06 0 bottom
U$193  [READER_#_M7E0]  96.77,120.78 0 bottom
U$194  [#USB#0]  99.31,82.3 0 bottom
U$195  [#VCC#0]  101.98,82.3 0 bottom
U$196  [#VIN_SEL#0]  100.58,80.64 0 bottom
U$197  [#_VO#0]  80.26,101.35 0 top
U$198  [#VO_#0]  80.26,101.35 0 bottom
U$199  [#_GND#0]  8.13,147.57 0 top
U$200  [#_VIN#0]  8.13,150.11 0 top
U$201  [#_IO4#0]  8.13,152.65 0 top
U$202  [#_IO3#0]  8.13,155.19 0 top
U$203  [#_IO2#0]  8.13,157.73 0 top
U$204  [#_IO1#0]  8.13,160.27 0 top
U$205  [#_EN#0]  8.13,162.81 0 top
U$206  [#GND_#0]  8.13,147.57 0 bottom
U$207  [#EN_#0]  8.13,162.81 0 bottom
U$208  [#IO1_#0]  8.13,160.27 0 bottom
U$209  [#IO2_#0]  8.13,157.73 0 bottom
U$210  [#IO3_#0]  8.13,155.19 0 bottom
U$211  [#IO4_#0]  8.13,152.65 0 bottom
U$212  [#VIN_#0]  8.13,150.11 0 bottom
U$213  [USB0]  32.26,139.32 90 top
U$214  [#PWR#0]  8.76,168.53 0 bottom
U$215  [#SHLD#0]  20.7,140.59 0 bottom
U$216  [PWR0]  9.52,170.31 0 top
U$217  [#RF#0]  29.64,180.72 0 top
U$218  [WARNING#_HOT##0]  24.64,149.48 0 bottom
U$219  [SERIAL0]  37.85,151.38 270 bottom
U$220  [SERIAL0]  37.85,151.38 90 top
U$221  [UART0]  37.97,143.13 90 top
U$222  [SER0]  34.8,139.32 90 top
U$223  [SIMULTANEOUS_RFID0]  24.64,187.07 0 top
U$224  [READER_#_M7E0]  24.64,184.78 0 top
U$225  [SIMULTANEOUS_RFID0]  24.64,187.07 0 bottom
U$226  [READER_#_M7E0]  24.64,184.78 0 bottom
U$227  [#USB#0]  27.18,146.3 0 bottom
U$228  [#VCC#0]  29.84,146.3 0 bottom
U$229  [#VIN_SEL#0]  28.45,144.65 0 bottom
U$230  [#_VO#0]  8.13,165.35 0 top
U$231  [#VO_#0]  8.13,165.35 0 bottom
U$232  [#_GND#0]  44.2,147.57 0 top
U$233  [#_VIN#0]  44.2,150.11 0 top
U$234  [#_IO4#0]  44.2,152.65 0 top
U$235  [#_IO3#0]  44.2,155.19 0 top
U$236  [#_IO2#0]  44.2,157.73 0 top
U$237  [#_IO1#0]  44.2,160.27 0 top
U$238  [#_EN#0]  44.2,162.81 0 top
U$239  [#GND_#0]  44.2,147.57 0 bottom
U$240  [#EN_#0]  44.2,162.81 0 bottom
U$241  [#IO1_#0]  44.2,160.27 0 bottom
U$242  [#IO2_#0]  44.2,157.73 0 bottom
U$243  [#IO3_#0]  44.2,155.19 0 bottom
U$244  [#IO4_#0]  44.2,152.65 0 bottom
U$245  [#VIN_#0]  44.2,150.11 0 bottom
U$246  [USB0]  68.33,139.32 90 top
U$247  [#PWR#0]  44.83,168.53 0 bottom
U$248  [#SHLD#0]  56.77,140.59 0 bottom
U$249  [PWR0]  45.59,170.31 0 top
U$250  [#RF#0]  65.71,180.72 0 top
U$251  [WARNING#_HOT##0]  60.71,149.48 0 bottom
U$252  [SERIAL0]  73.91,151.38 270 bottom
U$253  [SERIAL0]  73.91,151.38 90 top
U$254  [UART0]  74.04,143.13 90 top
U$255  [SER0]  70.87,139.32 90 top
U$256  [SIMULTANEOUS_RFID0]  60.71,187.07 0 top
U$257  [READER_#_M7E0]  60.71,184.78 0 top
U$258  [SIMULTANEOUS_RFID0]  60.71,187.07 0 bottom
U$259  [READER_#_M7E0]  60.71,184.78 0 bottom
U$260  [#USB#0]  63.25,146.3 0 bottom
U$261  [#VCC#0]  65.91,146.3 0 bottom
U$262  [#VIN_SEL#0]  64.52,144.65 0 bottom
U$263  [#_VO#0]  44.2,165.35 0 top
U$264  [#VO_#0]  44.2,165.35 0 bottom
U$265  [#_GND#0]  80.26,147.57 0 top
U$266  [#_VIN#0]  80.26,150.11 0 top
U$267  [#_IO4#0]  80.26,152.65 0 top
U$268  [#_IO3#0]  80.26,155.19 0 top
U$269  [#_IO2#0]  80.26,157.73 0 top
U$270  [#_IO1#0]  80.26,160.27 0 top
U$271  [#_EN#0]  80.26,162.81 0 top
U$272  [#GND_#0]  80.26,147.57 0 bottom
U$273  [#EN_#0]  80.26,162.81 0 bottom
U$274  [#IO1_#0]  80.26,160.27 0 bottom
U$275  [#IO2_#0]  80.26,157.73 0 bottom
U$276  [#IO3_#0]  80.26,155.19 0 bottom
U$277  [#IO4_#0]  80.26,152.65 0 bottom
U$278  [#VIN_#0]  80.26,150.11 0 bottom
U$279  [USB0]  104.39,139.32 90 top
U$280  [#PWR#0]  80.9,168.53 0 bottom
U$281  [#SHLD#0]  92.84,140.59 0 bottom
U$282  [PWR0]  81.66,170.31 0 top
U$283  [#RF#0]  101.78,180.72 0 top
U$284  [WARNING#_HOT##0]  96.77,149.48 0 bottom
U$285  [SERIAL0]  109.98,151.38 270 bottom
U$286  [SERIAL0]  109.98,151.38 90 top
U$287  [UART0]  110.11,143.13 90 top
U$288  [SER0]  106.93,139.32 90 top
U$289  [SIMULTANEOUS_RFID0]  96.77,187.07 0 top
U$290  [READER_#_M7E0]  96.77,184.78 0 top
U$291  [SIMULTANEOUS_RFID0]  96.77,187.07 0 bottom
U$292  [READER_#_M7E0]  96.77,184.78 0 bottom
U$293  [#USB#0]  99.31,146.3 0 bottom
U$294  [#VCC#0]  101.98,146.3 0 bottom
U$295  [#VIN_SEL#0]  100.58,144.65 0 bottom
U$296  [#_VO#0]  80.26,165.35 0 top
U$297  [#VO_#0]  80.26,165.35 0 bottom
VIN_SEL  JUMPER-SMT_3_2-NC_TRACE_SILK  [SMT-JUMPER_3_2-NC_TRACE_SILK]  28.45,18.29 0 bottom
VIN_SEL1  JUMPER-SMT_3_2-NC_TRACE_SILK  [SMT-JUMPER_3_2-NC_TRACE_SILK]  64.52,18.29 0 bottom
VIN_SEL2  JUMPER-SMT_3_2-NC_TRACE_SILK  [SMT-JUMPER_3_2-NC_TRACE_SILK]  100.58,18.29 0 bottom
VIN_SEL3  JUMPER-SMT_3_2-NC_TRACE_SILK  [SMT-JUMPER_3_2-NC_TRACE_SILK]  28.45,82.3 0 bottom
VIN_SEL4  JUMPER-SMT_3_2-NC_TRACE_SILK  [SMT-JUMPER_3_2-NC_TRACE_SILK]  64.52,82.3 0 bottom
VIN_SEL5  JUMPER-SMT_3_2-NC_TRACE_SILK  [SMT-JUMPER_3_2-NC_TRACE_SILK]  100.58,82.3 0 bottom
VIN_SEL6  JUMPER-SMT_3_2-NC_TRACE_SILK  [SMT-JUMPER_3_2-NC_TRACE_SILK]  28.45,146.3 0 bottom
VIN_SEL7  JUMPER-SMT_3_2-NC_TRACE_SILK  [SMT-JUMPER_3_2-NC_TRACE_SILK]  64.52,146.3 0 bottom
VIN_SEL8  JUMPER-SMT_3_2-NC_TRACE_SILK  [SMT-JUMPER_3_2-NC_TRACE_SILK]  100.58,146.3 0 bottom

## Library data of the parts
C1 C5 C8-C10 C14 C17-C19 C23 C26-C28 C32 C35-C37 C41 C44-C46 C50 C53-C55 C59 C62-C64 C68 C71-C73 C77 C80 C81 = SparkFun-Capacitors
C2 C7 C11 C16 C20 C25 C29 C34 C38 C43 C47 C52 C56 C61 C65 C70 C74 C79 = SparkFun-Capacitors; PROD_ID: CAP-00867
C3 C4 C12 C13 C21 C22 C30 C31 C39 C40 C48 C49 C57 C58 C66 C67 C75 C76 = SparkFun-Capacitors; PROD_ID: CAP-00810
C6 C15 C24 C33 C42 C51 C60 C69 C78 = SparkFun-Capacitors; PROD_ID: CAP-07886
D1 D3 D4 D6 D7 D9 D10 D12 D13 D15 D16 D18 D19 D21 D22 D24 D25 D27 = SparkFun-IC-Power; PROD_ID: DIO-14084
D2 D5 D8 D11 D14 D17 D20 D23 D26 = SparkFun-LED; PROD_ID: DIO-17976
E1-E9 = SparkFun-RF
E$1-E$4 FD1-FD36 LOGO1-LOGO27 = SparkFun-Aesthetics
E$5 E$6 = SparkFun-Retired
H1-H36 = SparkFun-Hardware
J1 J2 J7 J8 J11 J12 J15 J16 J19 J20 J23 J24 J27 J28 J31 J32 J35 J36 = SparkFun-Connectors
J3 J4 J9 J13 J17 J21 J25 J29 J33 = SparkFun-Connectors; PROD_ID: CONN-14122
J5 J6 J10 J14 J18 J22 J26 J30 J34 = SparkFun-Connectors; PROD_ID: CONN-09193; SF_ID: WRL-09144
L1-L9 = SparkFun-Coils; PROD_ID: NDUC-08761
PWR PWR1-PWR8 SHLD SHLD1-SHLD8 VIN_SEL VIN_SEL1-VIN_SEL8 = SparkFun-Jumpers
R1 R2 R6 R8 R9 R13 R15 R16 R20 R22 R23 R27 R29 R30 R34 R36 R37 R41 R43 R44 R48 R50 R51 R55 R57 R58 R62 = SparkFun-Resistors; PROD_ID: RES-12083
R3 R10 R17 R24 R31 R38 R45 R52 R59 = SparkFun-Resistors; PROD_ID: RES-07857
R4 R11 R18 R25 R32 R39 R46 R53 R60 = SparkFun-Resistors; PROD_ID: RES-08609
R5 R12 R19 R26 R33 R40 R47 R54 R61 = SparkFun-Resistors
R7 R14 R21 R28 R35 R42 R49 R56 R63 = SparkFun-Resistors; PROD_ID: RES-00824
S1-S9 = SparkFun-Switches; PROD_ID: SWCH-08179; SF_SKU: COM-00597
U1 U3 U5 U7 U9 U11 U13 U15 U17 = SparkFun-RF; PROD_ID: IC-21210
U2 U4 U6 U8 U10 U12 U14 U16 U18 = SparkFun-IC-Comms; PROD_ID: IC-14038
U$1-U$297 = output

## Nets
EN: J1.7 U1.11
EN1: J7.7 U3.11
EN2: J11.7 U5.11
EN3: J15.7 U7.11
EN4: J19.7 U9.11
EN5: J23.7 U11.11
EN6: J27.7 U13.11
EN7: J31.7 U15.11
EN8: J35.7 U17.11
GND: C1.2 C2.2 C3.2 C4.2 C5.2 C7.2 C8.2 C9.2 D1.2 D3.2 E1.GND@1 E1.GND@2 E1.GND@3 J1.1 J2.1 J3.GND J3.GND2 J5.1 J5.2 PWR.1 R1.1 R2.1 R7.1 SHLD.1 U1.1 U1.2 U1.3 U1.4 U1.5 U1.6 U1.7 U1.8 U1.9 U1.18 U1.19 U1.29 U1.30 U1.31 U1.32 U1.33 U1.34 U1.35 U1.36 U1.37 U1.38 U1.40 U1.41 U1.GND_PAD1 U1.GND_PAD2 U1.GND_PAD3 U2.1
GND1: C10.2 C11.2 C12.2 C13.2 C14.2 C16.2 C17.2 C18.2 D4.2 D6.2 E2.GND@1 E2.GND@2 E2.GND@3 J4.GND J4.GND2 J6.1 J6.2 J7.1 J8.1 PWR1.1 R8.1 R9.1 R14.1 SHLD1.1 U3.1 U3.2 U3.3 U3.4 U3.5 U3.6 U3.7 U3.8 U3.9 U3.18 U3.19 U3.29 U3.30 U3.31 U3.32 U3.33 U3.34 U3.35 U3.36 U3.37 U3.38 U3.40 U3.41 U3.GND_PAD1 U3.GND_PAD2 U3.GND_PAD3 U4.1
GND2: C19.2 C20.2 C21.2 C22.2 C23.2 C25.2 C26.2 C27.2 D7.2 D9.2 E3.GND@1 E3.GND@2 E3.GND@3 J9.GND J9.GND2 J10.1 J10.2 J11.1 J12.1 PWR2.1 R15.1 R16.1 R21.1 SHLD2.1 U5.1 U5.2 U5.3 U5.4 U5.5 U5.6 U5.7 U5.8 U5.9 U5.18 U5.19 U5.29 U5.30 U5.31 U5.32 U5.33 U5.34 U5.35 U5.36 U5.37 U5.38 U5.40 U5.41 U5.GND_PAD1 U5.GND_PAD2 U5.GND_PAD3 U6.1
GND3: C28.2 C29.2 C30.2 C31.2 C32.2 C34.2 C35.2 C36.2 D10.2 D12.2 E4.GND@1 E4.GND@2 E4.GND@3 J13.GND J13.GND2 J14.1 J14.2 J15.1 J16.1 PWR3.1 R22.1 R23.1 R28.1 SHLD3.1 U7.1 U7.2 U7.3 U7.4 U7.5 U7.6 U7.7 U7.8 U7.9 U7.18 U7.19 U7.29 U7.30 U7.31 U7.32 U7.33 U7.34 U7.35 U7.36 U7.37 U7.38 U7.40 U7.41 U7.GND_PAD1 U7.GND_PAD2 U7.GND_PAD3 U8.1
GND4: C37.2 C38.2 C39.2 C40.2 C41.2 C43.2 C44.2 C45.2 D13.2 D15.2 E5.GND@1 E5.GND@2 E5.GND@3 J17.GND J17.GND2 J18.1 J18.2 J19.1 J20.1 PWR4.1 R29.1 R30.1 R35.1 SHLD4.1 U9.1 U9.2 U9.3 U9.4 U9.5 U9.6 U9.7 U9.8 U9.9 U9.18 U9.19 U9.29 U9.30 U9.31 U9.32 U9.33 U9.34 U9.35 U9.36 U9.37 U9.38 U9.40 U9.41 U9.GND_PAD1 U9.GND_PAD2 U9.GND_PAD3 U10.1
GND5: C46.2 C47.2 C48.2 C49.2 C50.2 C52.2 C53.2 C54.2 D16.2 D18.2 E6.GND@1 E6.GND@2 E6.GND@3 J21.GND J21.GND2 J22.1 J22.2 J23.1 J24.1 PWR5.1 R36.1 R37.1 R42.1 SHLD5.1 U11.1 U11.2 U11.3 U11.4 U11.5 U11.6 U11.7 U11.8 U11.9 U11.18 U11.19 U11.29 U11.30 U11.31 U11.32 U11.33 U11.34 U11.35 U11.36 U11.37 U11.38 U11.40 U11.41 U11.GND_PAD1 U11.GND_PAD2 U11.GND_PAD3 U12.1
GND6: C55.2 C56.2 C57.2 C58.2 C59.2 C61.2 C62.2 C63.2 D19.2 D21.2 E7.GND@1 E7.GND@2 E7.GND@3 J25.GND J25.GND2 J26.1 J26.2 J27.1 J28.1 PWR6.1 R43.1 R44.1 R49.1 SHLD6.1 U13.1 U13.2 U13.3 U13.4 U13.5 U13.6 U13.7 U13.8 U13.9 U13.18 U13.19 U13.29 U13.30 U13.31 U13.32 U13.33 U13.34 U13.35 U13.36 U13.37 U13.38 U13.40 U13.41 U13.GND_PAD1 U13.GND_PAD2 U13.GND_PAD3 U14.1
GND7: C64.2 C65.2 C66.2 C67.2 C68.2 C70.2 C71.2 C72.2 D22.2 D24.2 E8.GND@1 E8.GND@2 E8.GND@3 J29.GND J29.GND2 J30.1 J30.2 J31.1 J32.1 PWR7.1 R50.1 R51.1 R56.1 SHLD7.1 U15.1 U15.2 U15.3 U15.4 U15.5 U15.6 U15.7 U15.8 U15.9 U15.18 U15.19 U15.29 U15.30 U15.31 U15.32 U15.33 U15.34 U15.35 U15.36 U15.37 U15.38 U15.40 U15.41 U15.GND_PAD1 U15.GND_PAD2 U15.GND_PAD3 U16.1
GND8: C73.2 C74.2 C75.2 C76.2 C77.2 C79.2 C80.2 C81.2 D25.2 D27.2 E9.GND@1 E9.GND@2 E9.GND@3 J33.GND J33.GND2 J34.1 J34.2 J35.1 J36.1 PWR8.1 R57.1 R58.1 R63.1 SHLD8.1 U17.1 U17.2 U17.3 U17.4 U17.5 U17.6 U17.7 U17.8 U17.9 U17.18 U17.19 U17.29 U17.30 U17.31 U17.32 U17.33 U17.34 U17.35 U17.36 U17.37 U17.38 U17.40 U17.41 U17.GND_PAD1 U17.GND_PAD2 U17.GND_PAD3 U18.1
GPIO1: J1.6 U1.12
GPIO2: J1.5 U1.13
GPIO3: J1.4 U1.14
GPIO4: J1.3 U1.15
GPIO5: J7.6 U3.12
GPIO6: J7.5 U3.13
GPIO7: J7.4 U3.14
GPIO8: J7.3 U3.15
GPIO9: J11.6 U5.12
GPIO10: J11.5 U5.13
GPIO11: J11.4 U5.14
GPIO12: J11.3 U5.15
GPIO13: J15.6 U7.12
GPIO14: J15.5 U7.13
GPIO15: J15.4 U7.14
GPIO16: J15.3 U7.15
GPIO17: J19.6 U9.12
GPIO18: J19.5 U9.13
GPIO19: J19.4 U9.14
GPIO20: J19.3 U9.15
GPIO21: J23.6 U11.12
GPIO22: J23.5 U11.13
GPIO23: J23.4 U11.14
GPIO24: J23.3 U11.15
GPIO25: J27.6 U13.12
GPIO26: J27.5 U13.13
GPIO27: J27.4 U13.14
GPIO28: J27.3 U13.15
GPIO29: J31.6 U15.12
GPIO30: J31.5 U15.13
GPIO31: J31.4 U15.14
GPIO32: J31.3 U15.15
GPIO33: J35.6 U17.12
GPIO34: J35.5 U17.13
GPIO35: J35.4 U17.14
GPIO36: J35.3 U17.15
N$1: C1.1 E1.ANT L1.2
N$2: D2.A R3.1
N$3: J3.B5 R1.2
N$4: J3.A5 R2.2
N$5: D1.1 J3.A6 J3.B6
N$6: D2.C PWR.2
N$7: D1.3 J3.A7 J3.B7
N$8: C6.1 C8.1 R5.1
N$9: C5.1 C6.2 J5.FEED
N$10: C9.1 L1.1 R4.2
N$11: C7.1 U2.4
N$12: D3.6 U1.20
N$13: D3.4 U1.21
N$14: R6.2 U2.2
N$15: C10.1 E2.ANT L2.2
N$16: J4.B5 R8.2
N$17: J4.A5 R9.2
N$18: D4.1 J4.A6 J4.B6
N$19: D4.3 J4.A7 J4.B7
N$20: C15.1 C17.1 R12.1
N$21: C14.1 C15.2 J6.FEED
N$22: C18.1 L2.1 R11.2
N$23: C16.1 U4.4
N$24: D6.6 U3.20
N$25: D6.4 U3.21
N$26: D5.A R10.1
N$27: D5.C PWR1.2
N$28: R13.2 U4.2
N$29: C19.1 E3.ANT L3.2
N$30: J9.B5 R15.2
N$31: J9.A5 R16.2
N$32: D7.1 J9.A6 J9.B6
N$33: D7.3 J9.A7 J9.B7
N$34: C24.1 C26.1 R19.1
N$35: C23.1 C24.2 J10.FEED
N$36: C27.1 L3.1 R18.2
N$37: C25.1 U6.4
N$38: D9.6 U5.20
N$39: D9.4 U5.21
N$40: D8.A R17.1
N$41: D8.C PWR2.2
N$42: R20.2 U6.2
N$43: C28.1 E4.ANT L4.2
N$44: J13.B5 R22.2
N$45: J13.A5 R23.2
N$46: D10.1 J13.A6 J13.B6
N$47: D10.3 J13.A7 J13.B7
N$48: C33.1 C35.1 R26.1
N$49: C32.1 C33.2 J14.FEED
N$50: C36.1 L4.1 R25.2
N$51: C34.1 U8.4
N$52: D12.6 U7.20
N$53: D12.4 U7.21
N$54: D11.A R24.1
N$55: D11.C PWR3.2
N$56: R27.2 U8.2
N$57: C37.1 E5.ANT L5.2
N$58: J17.B5 R29.2
N$59: J17.A5 R30.2
N$60: D13.1 J17.A6 J17.B6
N$61: D13.3 J17.A7 J17.B7
N$62: C42.1 C44.1 R33.1
N$63: C41.1 C42.2 J18.FEED
N$64: C45.1 L5.1 R32.2
N$65: C43.1 U10.4
N$66: D15.6 U9.20
N$67: D15.4 U9.21
N$68: D14.A R31.1
N$69: D14.C PWR4.2
N$70: R34.2 U10.2
N$71: C46.1 E6.ANT L6.2
N$72: J21.B5 R36.2
N$73: J21.A5 R37.2
N$74: D16.1 J21.A6 J21.B6
N$75: D16.3 J21.A7 J21.B7
N$76: C51.1 C53.1 R40.1
N$77: C50.1 C51.2 J22.FEED
N$78: C54.1 L6.1 R39.2
N$79: C52.1 U12.4
N$80: D18.6 U11.20
N$81: D18.4 U11.21
N$82: D17.A R38.1
N$83: D17.C PWR5.2
N$84: R41.2 U12.2
N$85: C55.1 E7.ANT L7.2
N$86: J25.B5 R43.2
N$87: J25.A5 R44.2
N$88: D19.1 J25.A6 J25.B6
N$89: D19.3 J25.A7 J25.B7
N$90: C60.1 C62.1 R47.1
N$91: C59.1 C60.2 J26.FEED
N$92: C63.1 L7.1 R46.2
N$93: C61.1 U14.4
N$94: D21.6 U13.20
N$95: D21.4 U13.21
N$96: D20.A R45.1
N$97: D20.C PWR6.2
N$98: R48.2 U14.2
N$99: C64.1 E8.ANT L8.2
N$100: J29.B5 R50.2
N$101: J29.A5 R51.2
N$102: D22.1 J29.A6 J29.B6
N$103: D22.3 J29.A7 J29.B7
N$104: C69.1 C71.1 R54.1
N$105: C68.1 C69.2 J30.FEED
N$106: C72.1 L8.1 R53.2
N$107: C70.1 U16.4
N$108: D24.6 U15.20
N$109: D24.4 U15.21
N$110: D23.A R52.1
N$111: D23.C PWR7.2
N$112: R55.2 U16.2
N$113: C73.1 E9.ANT L9.2
N$114: J33.B5 R57.2
N$115: J33.A5 R58.2
N$116: D25.1 J33.A6 J33.B6
N$117: D25.3 J33.A7 J33.B7
N$118: C78.1 C80.1 R61.1
N$119: C77.1 C78.2 J34.FEED
N$120: C81.1 L9.1 R60.2
N$121: C79.1 U18.4
N$122: D27.6 U17.20
N$123: D27.4 U17.21
N$124: D26.A R59.1
N$125: D26.C PWR8.2
N$126: R62.2 U18.2
RF: R4.1 R5.2 U1.39
RF1: R11.1 R12.2 U3.39
RF2: R18.1 R19.2 U5.39
RF3: R25.1 R26.2 U7.39
RF4: R32.1 R33.2 U9.39
RF5: R39.1 R40.2 U11.39
RF6: R46.1 R47.2 U13.39
RF7: R53.1 R54.2 U15.39
RF8: R60.1 R61.2 U17.39
RX: D3.3 S1.5
RX1: D6.3 S2.5
RX2: D9.3 S3.5
RX3: D12.3 S4.5
RX4: D15.3 S5.5
RX5: D18.3 S6.5
RX6: D21.3 S7.5
RX7: D24.3 S8.5
RX8: D27.3 S9.5
RX_SER: J2.4 S1.4
RX_SER1: J8.4 S2.4
RX_SER2: J12.4 S3.4
RX_SER3: J16.4 S4.4
RX_SER4: J20.4 S5.4
RX_SER5: J24.4 S6.4
RX_SER6: J28.4 S7.4
RX_SER7: J32.4 S8.4
RX_SER8: J36.4 S9.4
RX_USB: R6.1 R7.2 S1.6
RX_USB1: R13.1 R14.2 S2.6
RX_USB2: R20.1 R21.2 S3.6
RX_USB3: R27.1 R28.2 S4.6
RX_USB4: R34.1 R35.2 S5.6
RX_USB5: R41.1 R42.2 S6.6
RX_USB6: R48.1 R49.2 S7.6
RX_USB7: R55.1 R56.2 S8.6
RX_USB8: R62.1 R63.2 S9.6
SHLD: J3.SHLD1 J3.SHLD2 J3.SHLD3 J3.SHLD4 SHLD.2
SHLD1: J4.SHLD1 J4.SHLD2 J4.SHLD3 J4.SHLD4 SHLD1.2
SHLD2: J9.SHLD1 J9.SHLD2 J9.SHLD3 J9.SHLD4 SHLD2.2
SHLD3: J13.SHLD1 J13.SHLD2 J13.SHLD3 J13.SHLD4 SHLD3.2
SHLD4: J17.SHLD1 J17.SHLD2 J17.SHLD3 J17.SHLD4 SHLD4.2
SHLD5: J21.SHLD1 J21.SHLD2 J21.SHLD3 J21.SHLD4 SHLD5.2
SHLD6: J25.SHLD1 J25.SHLD2 J25.SHLD3 J25.SHLD4 SHLD6.2
SHLD7: J29.SHLD1 J29.SHLD2 J29.SHLD3 J29.SHLD4 SHLD7.2
SHLD8: J33.SHLD1 J33.SHLD2 J33.SHLD3 J33.SHLD4 SHLD8.2
TX: D3.1 S1.2
TX1: D6.1 S2.2
TX2: D9.1 S3.2
TX3: D12.1 S4.2
TX4: D15.1 S5.2
TX5: D18.1 S6.2
TX6: D21.1 S7.2
TX7: D24.1 S8.2
TX8: D27.1 S9.2
TX_SER: J2.5 S1.1
TX_SER1: J8.5 S2.1
TX_SER2: J12.5 S3.1
TX_SER3: J16.5 S4.1
TX_SER4: J20.5 S5.1
TX_SER5: J24.5 S6.1
TX_SER6: J28.5 S7.1
TX_SER7: J32.5 S8.1
TX_SER8: J36.5 S9.1
TX_USB: S1.3 U2.3
TX_USB1: S2.3 U4.3
TX_USB2: S3.3 U6.3
TX_USB3: S4.3 U8.3
TX_USB4: S5.3 U10.3
TX_USB5: S6.3 U12.3
TX_USB6: S7.3 U14.3
TX_USB7: S8.3 U16.3
TX_USB8: S9.3 U18.3
USB_N [USB]: D1.4 U2.6
USB_N1 [USB]: D4.4 U4.6
USB_N2 [USB]: D7.4 U6.6
USB_N3 [USB]: D10.4 U8.6
USB_N4 [USB]: D13.4 U10.6
USB_N5 [USB]: D16.4 U12.6
USB_N6 [USB]: D19.4 U14.6
USB_N7 [USB]: D22.4 U16.6
USB_N8 [USB]: D25.4 U18.6
USB_P [USB]: D1.6 U2.5
USB_P1 [USB]: D4.6 U4.5
USB_P2 [USB]: D7.6 U6.5
USB_P3 [USB]: D10.6 U8.5
USB_P4 [USB]: D13.6 U10.5
USB_P5 [USB]: D16.6 U12.5
USB_P6 [USB]: D19.6 U14.5
USB_P7 [USB]: D22.6 U16.5
USB_P8 [USB]: D25.6 U18.5
V_USB: C3.1 D1.5 J3.VBUS1 J3.VBUS2 U2.16 VIN_SEL.3
V_USB1: C12.1 D4.5 J4.VBUS1 J4.VBUS2 U4.16 VIN_SEL1.3
V_USB2: C21.1 D7.5 J9.VBUS1 J9.VBUS2 U6.16 VIN_SEL2.3
V_USB3: C30.1 D10.5 J13.VBUS1 J13.VBUS2 U8.16 VIN_SEL3.3
V_USB4: C39.1 D13.5 J17.VBUS1 J17.VBUS2 U10.16 VIN_SEL4.3
V_USB5: C48.1 D16.5 J21.VBUS1 J21.VBUS2 U12.16 VIN_SEL5.3
V_USB6: C57.1 D19.5 J25.VBUS1 J25.VBUS2 U14.16 VIN_SEL6.3
V_USB7: C66.1 D22.5 J29.VBUS1 J29.VBUS2 U16.16 VIN_SEL7.3
V_USB8: C75.1 D25.5 J33.VBUS1 J33.VBUS2 U18.16 VIN_SEL8.3
VCC: J2.3 VIN_SEL.1
VCC1: J8.3 VIN_SEL1.1
VCC2: J12.3 VIN_SEL2.1
VCC3: J16.3 VIN_SEL3.1
VCC4: J20.3 VIN_SEL4.1
VCC5: J24.3 VIN_SEL5.1
VCC6: J28.3 VIN_SEL6.1
VCC7: J32.3 VIN_SEL7.1
VCC8: J36.3 VIN_SEL8.1
VIN: C2.1 C4.1 J1.2 U1.16 U1.17 VIN_SEL.2
VIN1: C11.1 C13.1 J7.2 U3.16 U3.17 VIN_SEL1.2
VIN2: C20.1 C22.1 J11.2 U5.16 U5.17 VIN_SEL2.2
VIN3: C29.1 C31.1 J15.2 U7.16 U7.17 VIN_SEL3.2
VIN4: C38.1 C40.1 J19.2 U9.16 U9.17 VIN_SEL4.2
VIN5: C47.1 C49.1 J23.2 U11.16 U11.17 VIN_SEL5.2
VIN6: C56.1 C58.1 J27.2 U13.16 U13.17 VIN_SEL6.2
VIN7: C65.1 C67.1 J31.2 U15.16 U15.17 VIN_SEL7.2
VIN8: C74.1 C76.1 J35.2 U17.16 U17.17 VIN_SEL8.2
VOUT: D3.5 J1.8 R3.2 U1.10
VOUT1: D6.5 J7.8 R10.2 U3.10
VOUT2: D9.5 J11.8 R17.2 U5.10
VOUT3: D12.5 J15.8 R24.2 U7.10
VOUT4: D15.5 J19.8 R31.2 U9.10
VOUT5: D18.5 J23.8 R38.2 U11.10
VOUT6: D21.5 J27.8 R45.2 U13.10
VOUT7: D24.5 J31.8 R52.2 U15.10
VOUT8: D27.5 J35.8 R59.2 U17.10

## Tracks (layer width: path | path; a pad name or v marks a point on that pad's centre or on a via)
EN
  Top 0.254: U1.11 9.63,33.3 J1.7
EN1
  Top 0.254: U3.11 45.7,33.3 J7.7
EN2
  Top 0.254: U5.11 81.76,33.3 J11.7
EN3
  Top 0.254: U7.11 9.63,97.31 J15.7
EN4
  Top 0.254: U9.11 45.7,97.31 J19.7
EN5
  Top 0.254: U11.11 81.76,97.31 J23.7
EN6
  Top 0.254: U13.11 9.63,161.31 J27.7
EN7
  Top 0.254: U15.11 45.7,161.31 J31.7
EN8
  Top 0.254: U17.11 81.76,161.31 J35.7
GND  (via drill 0.3)  (256 unrouted)
  Top 0.127: v17.02,15.75 19.11,15.75 20.93,17.57 20.93,19.14 C7.2
  Top 0.254: C1.2 34.29,55.25 v34.16,55.12 | U1.GND_PAD1 27.29,36.45 v27.05,36.45 | U1.GND_PAD3 19.14,39.46 v19.68,40 | R1.1 28.23,19.18 28.96,19.18 | 28.96,18.29 28.96,19.18 | 28.96,19.18 28.96,20.07 | v32,19.81 33.02,20.83 R7.1
  other vias: 17.14,40 25.78,38.99 27.05,38.99 28.32,38.99 29.59,38.99 29.59,37.72 28.32,37.72 27.05,37.72 25.78,37.72 17.14,38.73 18.41,40 25.78,36.45 28.32,36.45 29.59,36.45 29.59,35.18 28.32,35.18 27.05,35.18 25.78,35.18 18.41,38.73 20.95,38.73 20.95,40 19.68,38.73 30.1,43.56 30.1,42.42 28.83,42.42 28.83,43.56 27.56,43.56 27.56,42.42 26.29,42.42 26.29,43.56 25.02,43.56 25.02,42.42 23.75,42.42 23.75,43.56 22.48,43.56 22.48,42.42 21.21,42.42 21.21,43.56 19.94,43.56 19.94,42.42 19.94,44.7 21.21,44.7 22.48,44.7 23.75,44.7 23.75,45.72 22.48,45.72 21.21,45.72 19.94,45.72 19.94,46.99 21.21,46.99 22.48,46.99 23.75,46.99 25.91,47.5 27.18,46.23 18.29,47.5 15.75,47.5 17.02,46.23 32.89,53.85 34.16,53.85 34.16,52.58 32.89,52.58 32.89,55.12 12.57,28.96 12.57,30.23 12.57,31.39 12.57,32.64 12.57,33.91 9.4,51.31 10.67,50.04 13.21,50.04 8.13,52.58 17.02,48.77 15.75,50.04 15.75,52.58 14.48,51.31 23.37,50.04 24.64,48.77 27.18,48.77 28.45,50.04 34.8,48.77 37.34,48.77 39.88,48.77 8.13,50.04 11.94,51.31 10.67,52.58 20.83,52.58 23.37,52.58 25.91,52.58 28.45,52.58 30.99,50.04 41.15,50.04 39.88,51.31 29.72,46.23 32.26,48.77 38.61,47.5 37.34,46.23 38.61,42.42 38.61,39.88 38.61,37.34 41.15,47.5 39.88,41.15 41.15,42.42 39.88,38.61 10.67,47.5 11.94,46.23 10.67,42.42 11.94,37.34 11.94,10.67 10.67,14.48 8.13,17.02 10.67,19.56 17.02,20.83 19.56,20.83 27.18,20.83 36.07,22.1 33.53,19.43 24.64,17.02 14.48,15.75 17.02,10.67 14.48,20.83 15.75,19.56 15.75,11.94 11.94,36.07 11.94,41.15 11.94,38.61 11.94,43.69 13.21,47.5 33.53,47.5 36.07,47.5 38.61,50.04 37.34,43.69 37.34,41.15 37.34,38.61 18.29,22.1 20.83,22.1 23.37,22.1 25.91,22.1 28.45,22.1 30.99,22.1 33.53,22.1 23.37,19.3 23.37,17.4 25.72,17.4 8.13,14.48 9.4,18.29 7.49,25.91 7.49,23.37 7.49,28.45 7.49,36.07 7.49,30.99 7.49,33.53 41.15,14.48 14.48,23.37 15.75,22.1 34.8,23.37 10.67,25.91 11.94,13.21 13.21,52.58 30.99,52.58 36.07,50.04 36.07,52.58 38.61,52.58 41.15,52.58 19.56,48.77 9.4,48.77 8.13,47.5 11.94,48.77 14.48,48.77 41.15,39.88 41.15,37.34 39.88,36.07 37.34,36.07 38.61,34.8 41.15,34.8 39.88,33.53 37.34,33.53 37.34,30.99 37.34,28.45 38.61,32.26 38.61,29.72 38.61,27.18 34.8,20.83 36.7,26.42 36.7,20.19 30.99,13.46 34.8,17.53 36.07,14.48 30.99,10.67 33.53,10.67 36.07,10.67 37.34,11.94 34.8,13.21 41.78,20.83 41.78,23.37 41.78,18.29 37.34,19.18 28.57,16.26 38.61,23.37 38.61,17.02 10.67,17.02 22.1,48.77 31.37,43.56 31.37,42.42 32.26,46.23 19.37,14.48 31.75,16.64
  pour Top (isolate 0.127, rank 3): 6.86,9.4 42.42,9.4 42.42,52.83 6.86,52.83
  pour Bottom (isolate 0.127, rank 2): 42.42,9.4 6.86,9.4 6.86,52.83 42.42,52.83
  pour Top (isolate 0.127, no thermals): 30.99,52.83 30.99,51.31 36.07,51.31 36.07,52.83